# Altium PCB TSI_SAMP_SAMI_V3.4.PcbDoc (part 1 of 5)
Units mm, origin at the board's own origin, x right, y up, seen from the top; angles counter-clockwise.
Board outline 189 x 127.41 mm, 4 copper layers (Top Layer, GROUND, POWER, Bottom Layer), stack 1.56 mm thick; 227 components, 161 nets, 868 pads, 584 vias.
Unrouted connection lines stored in the file: 18.
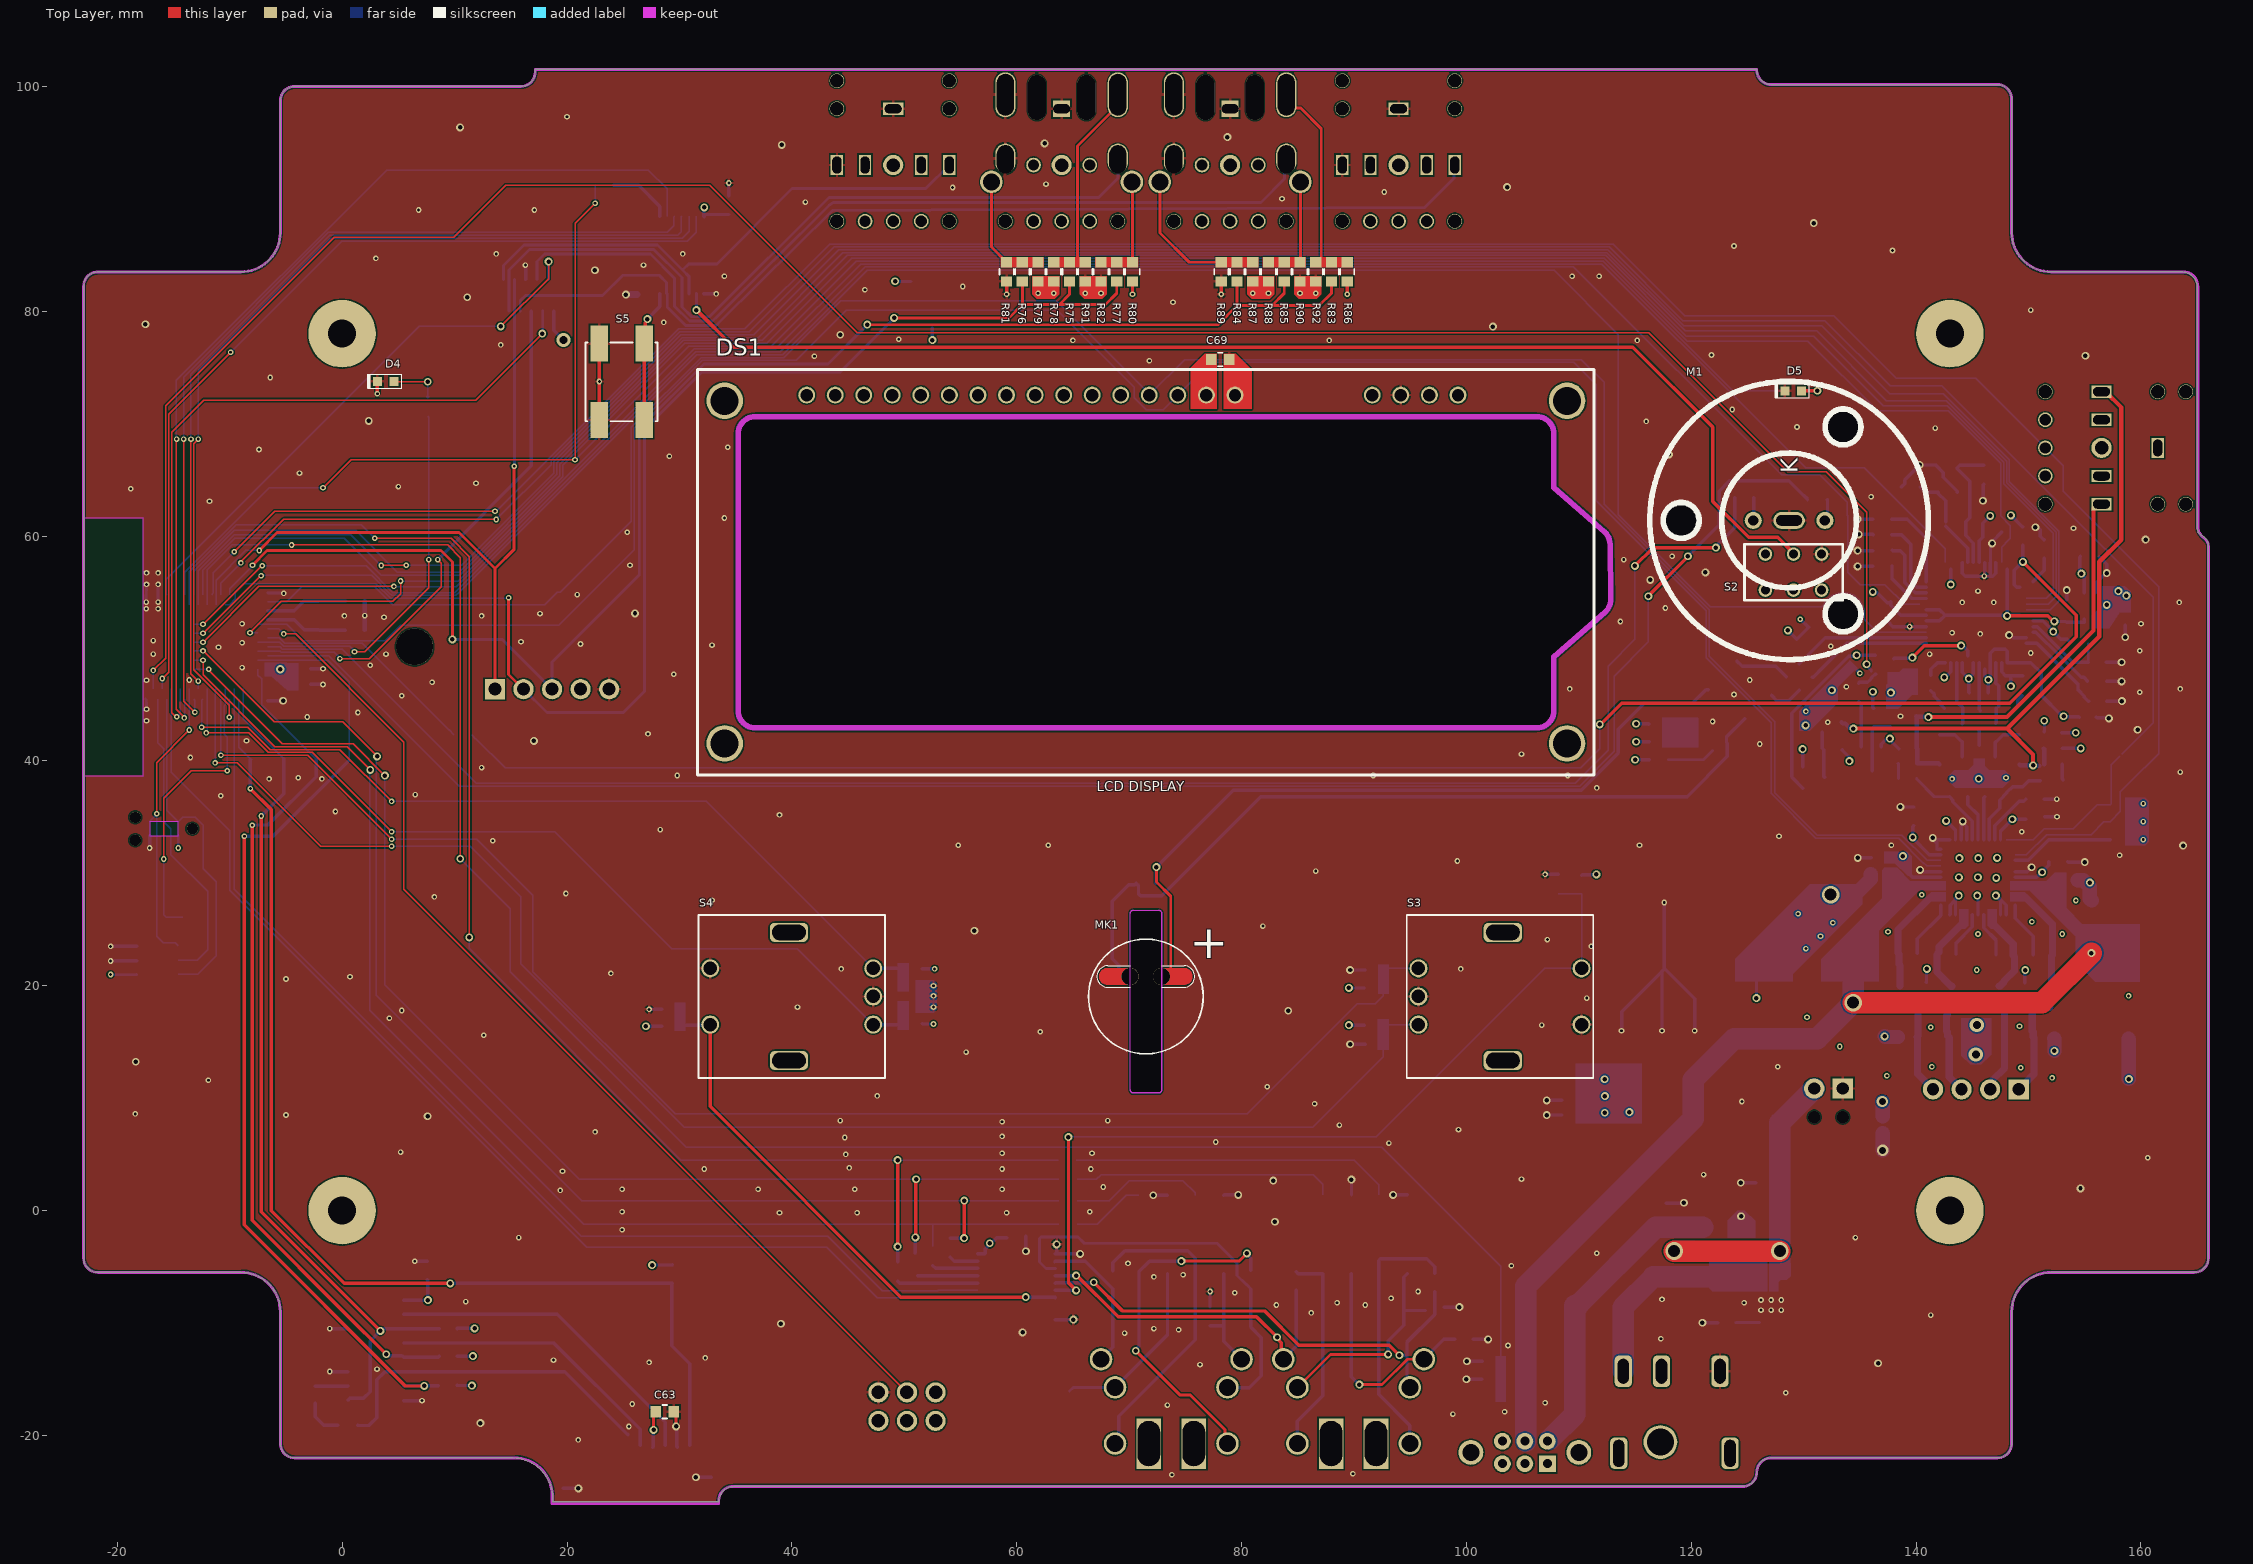
[diagram p0: Top Layer view]
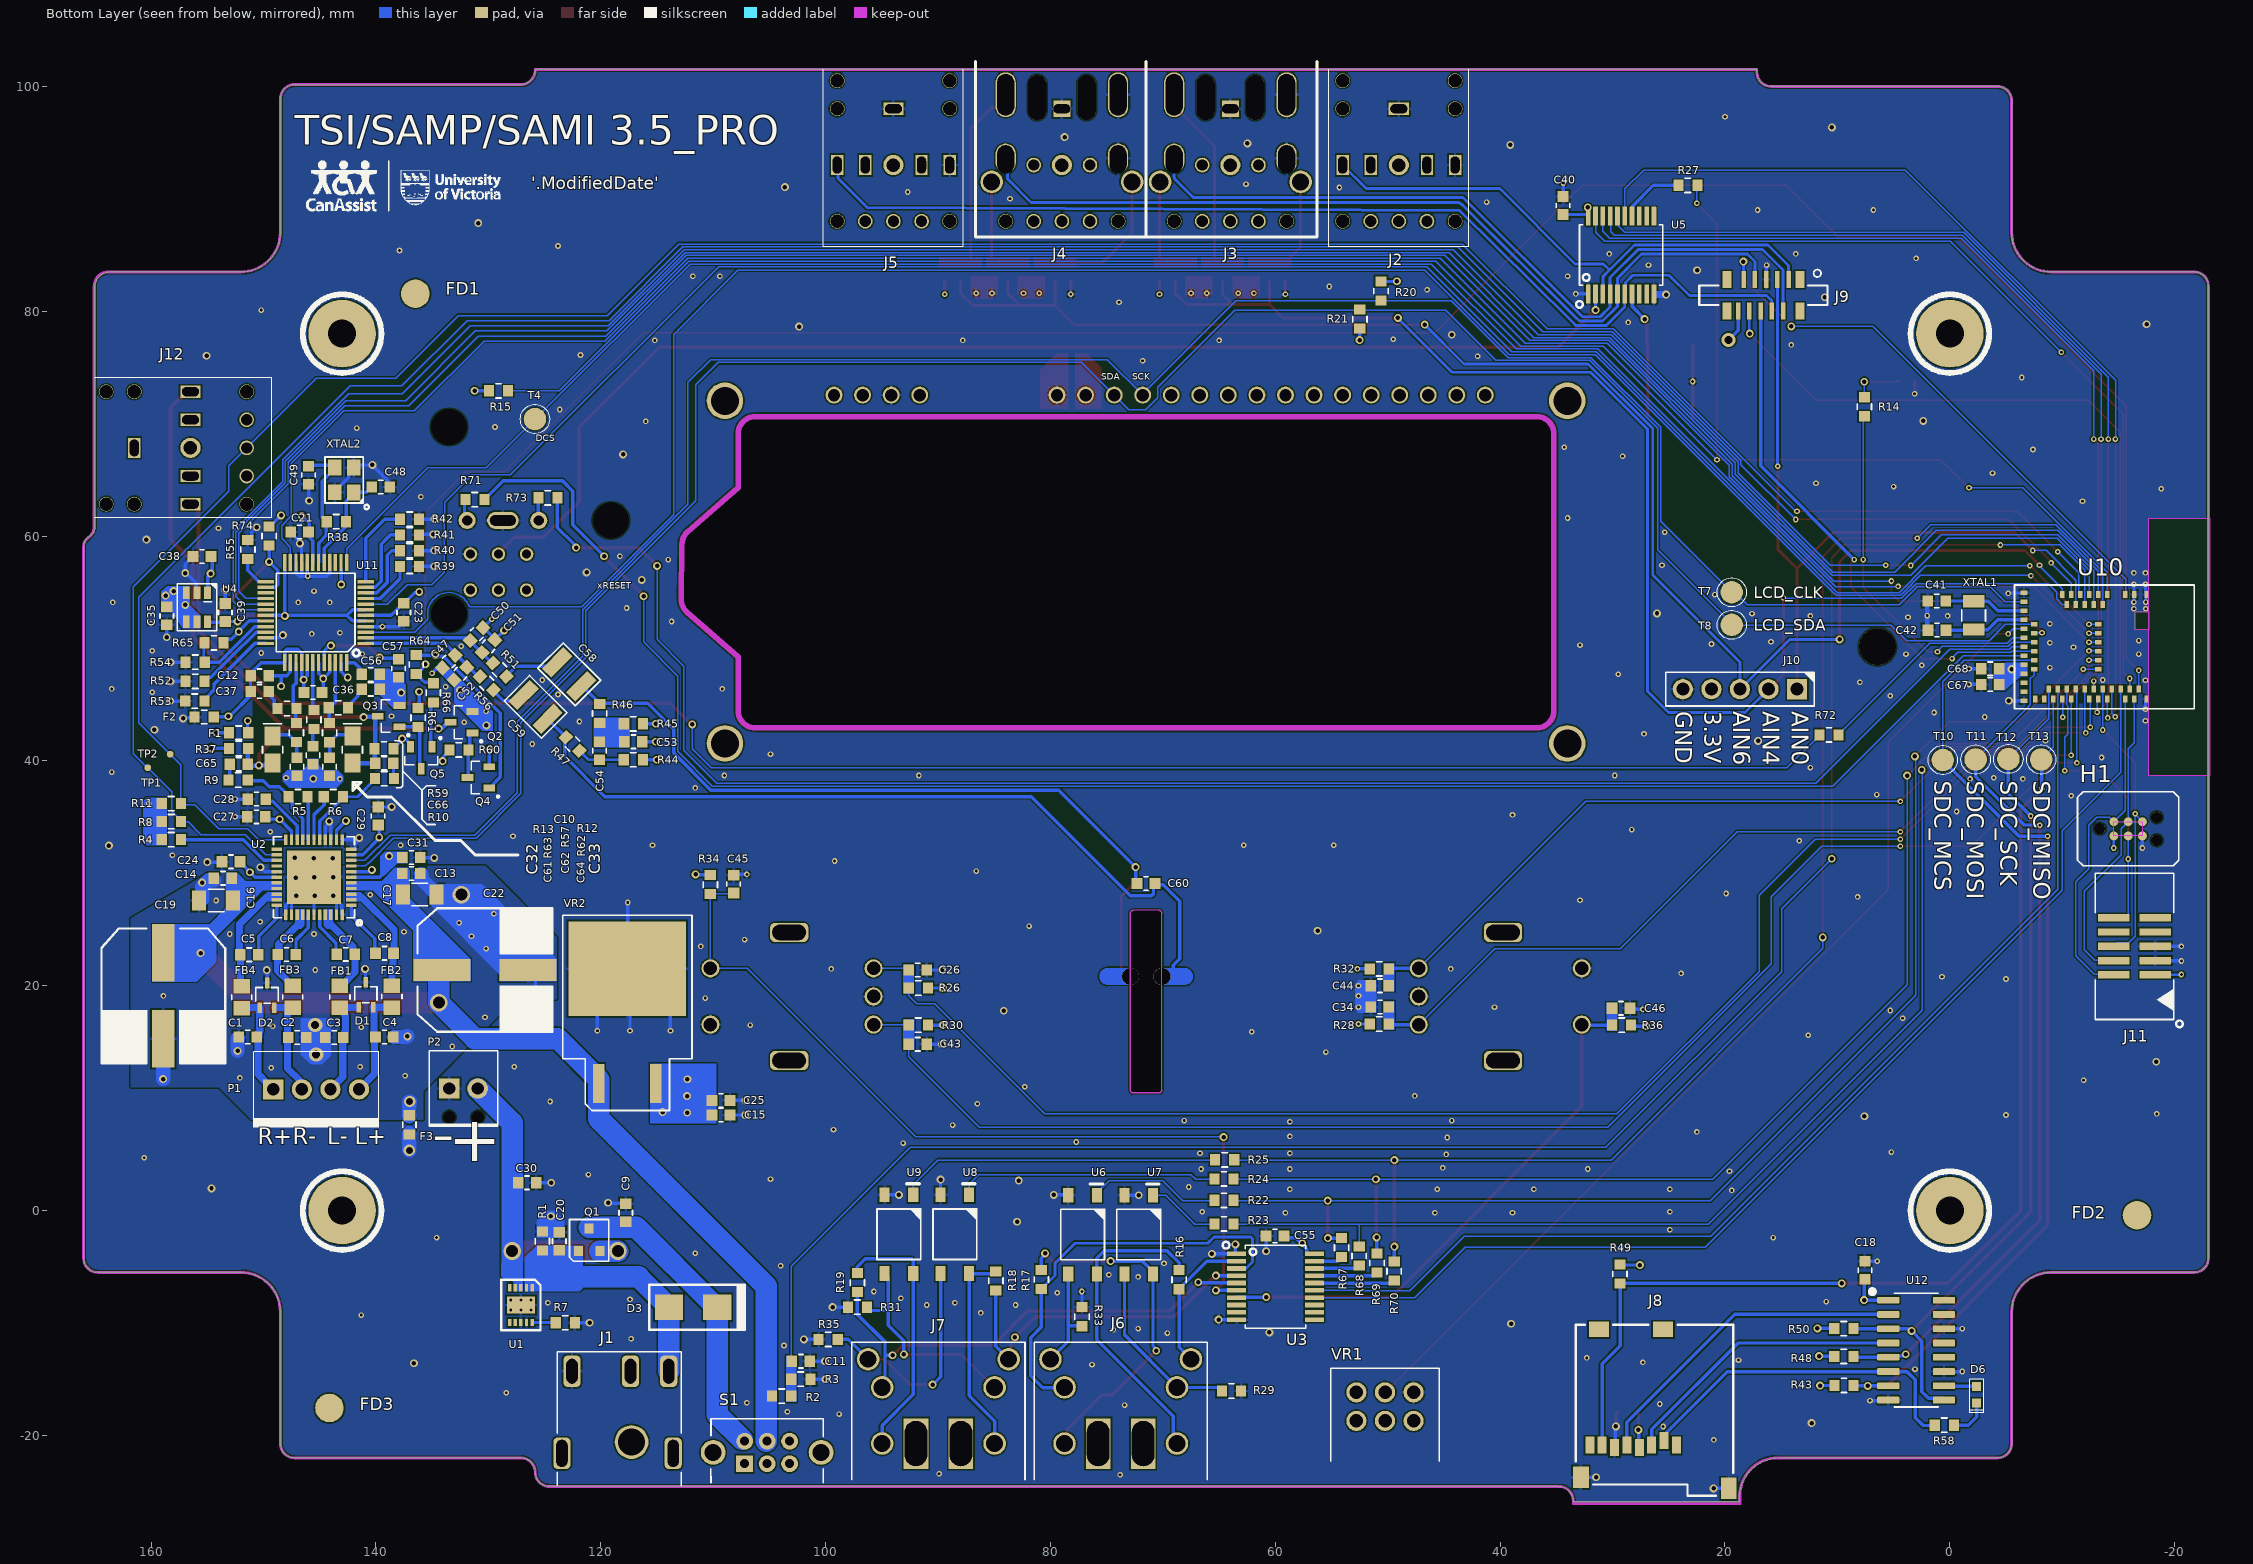
[diagram p1: Bottom Layer view, seen from below]
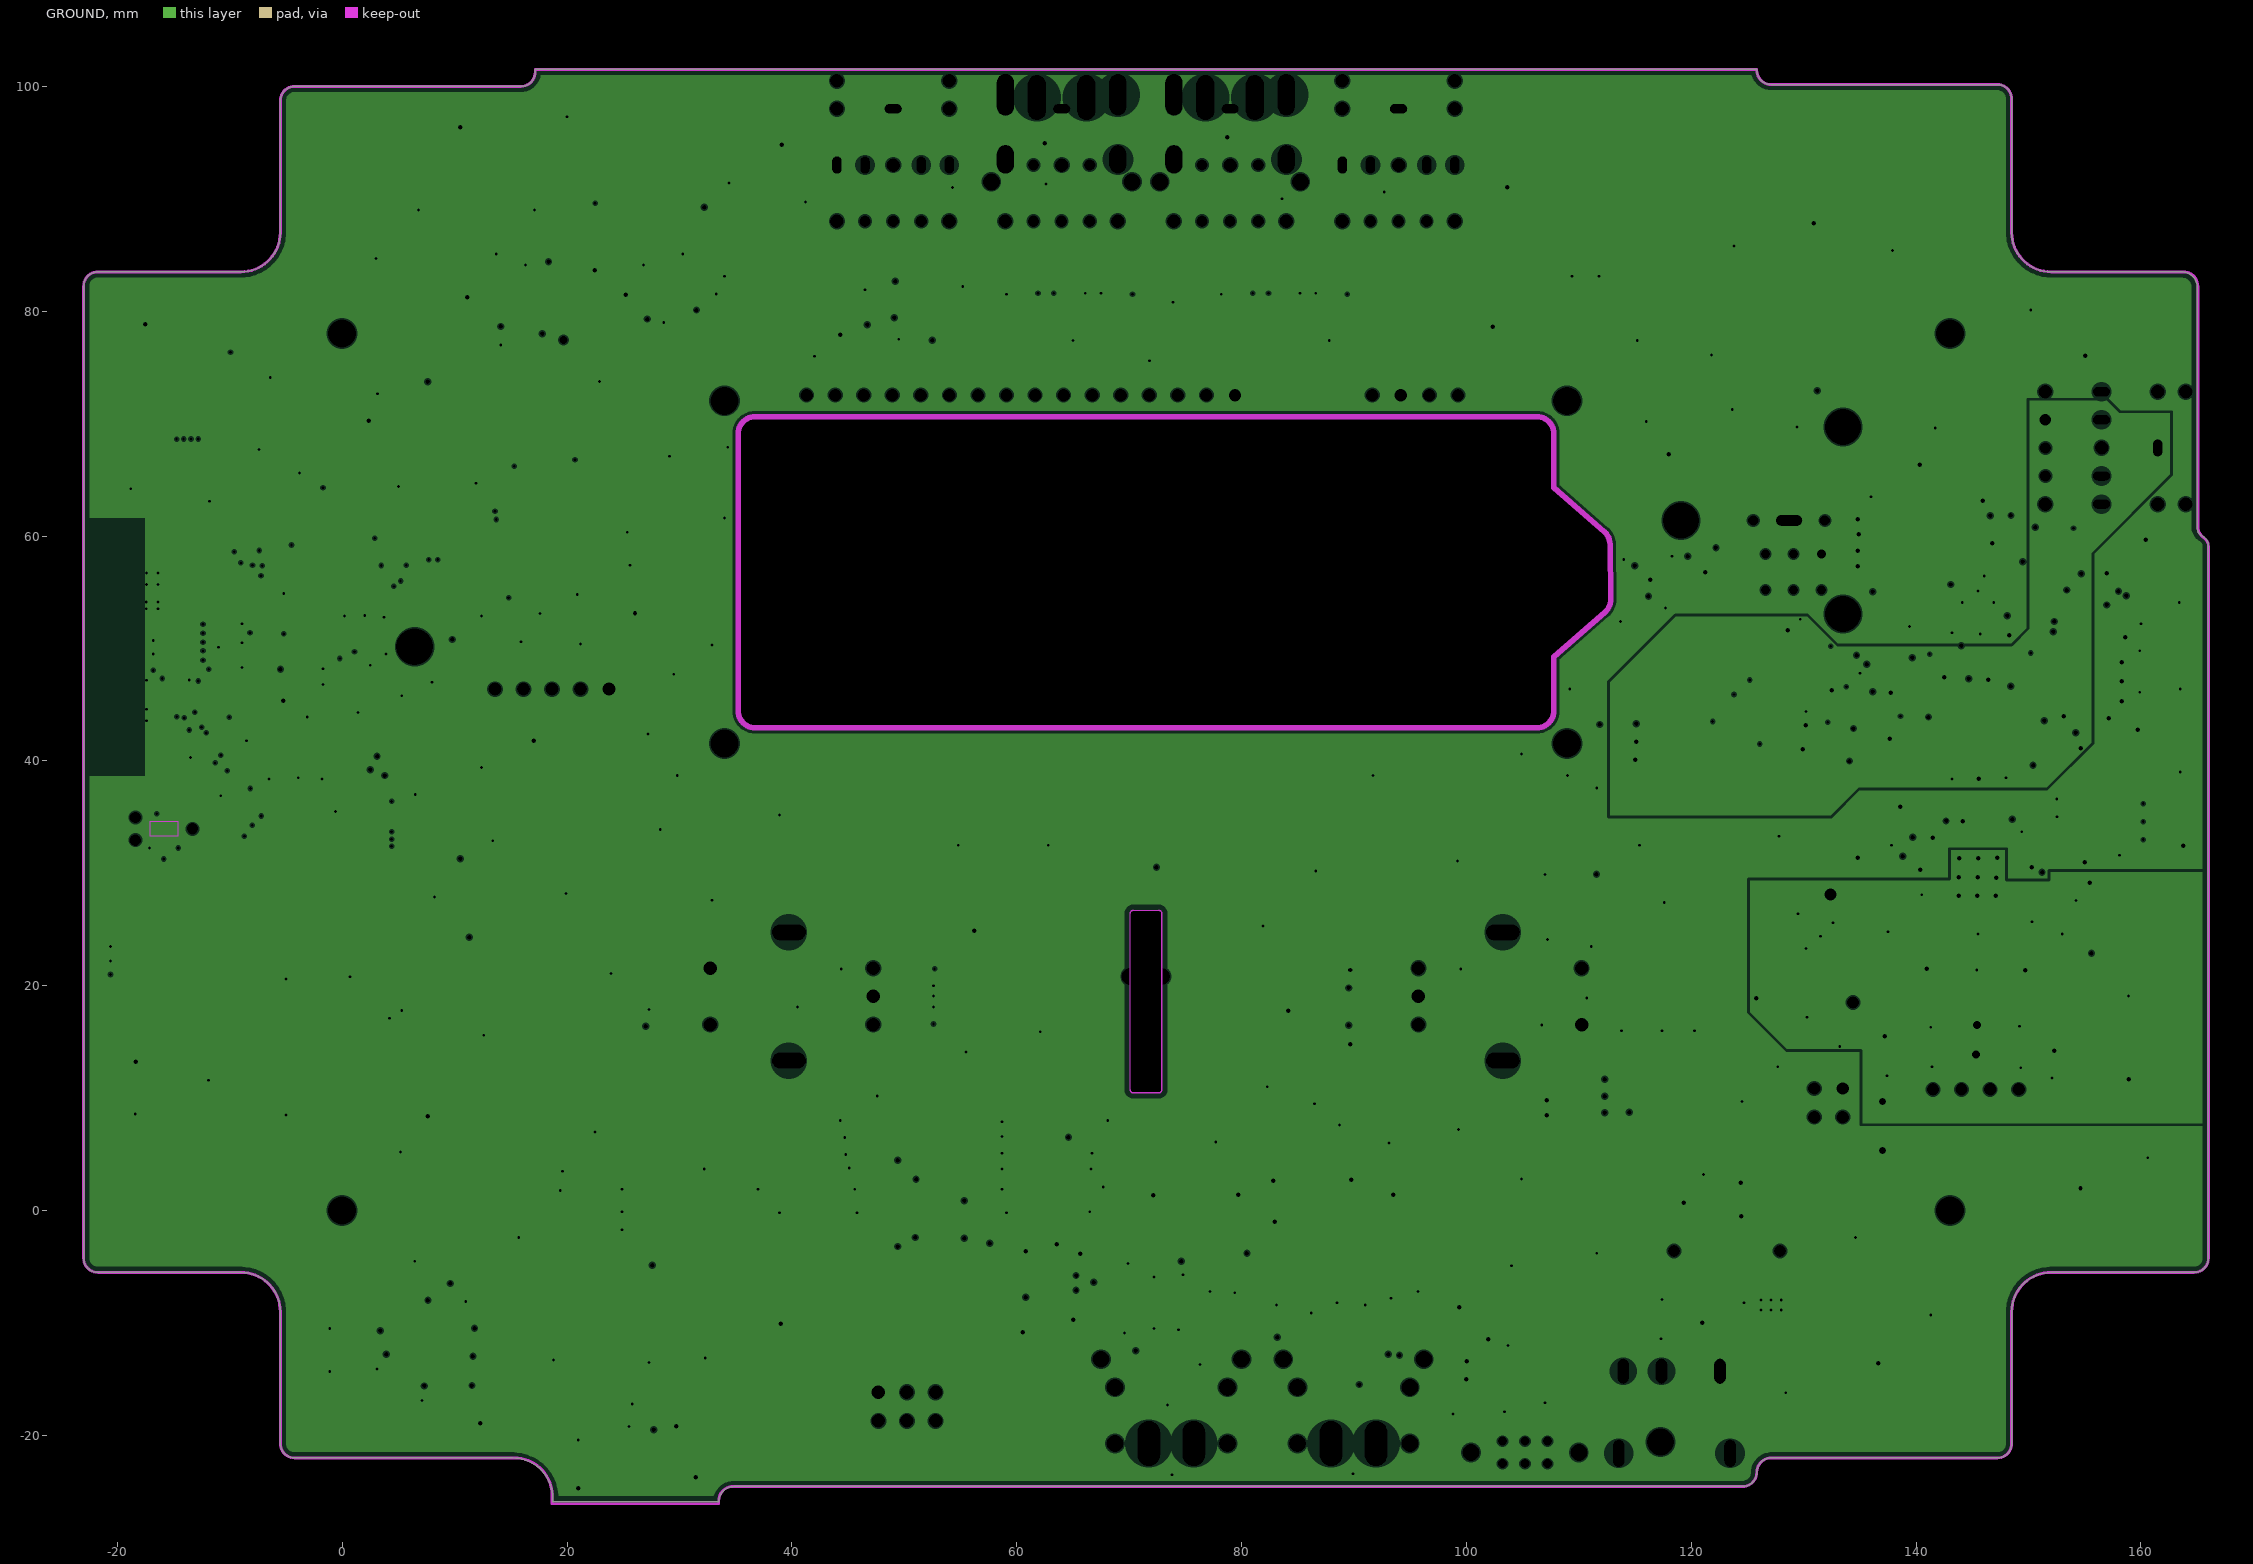
[diagram p2: GROUND, clearances drawn from the general rule]
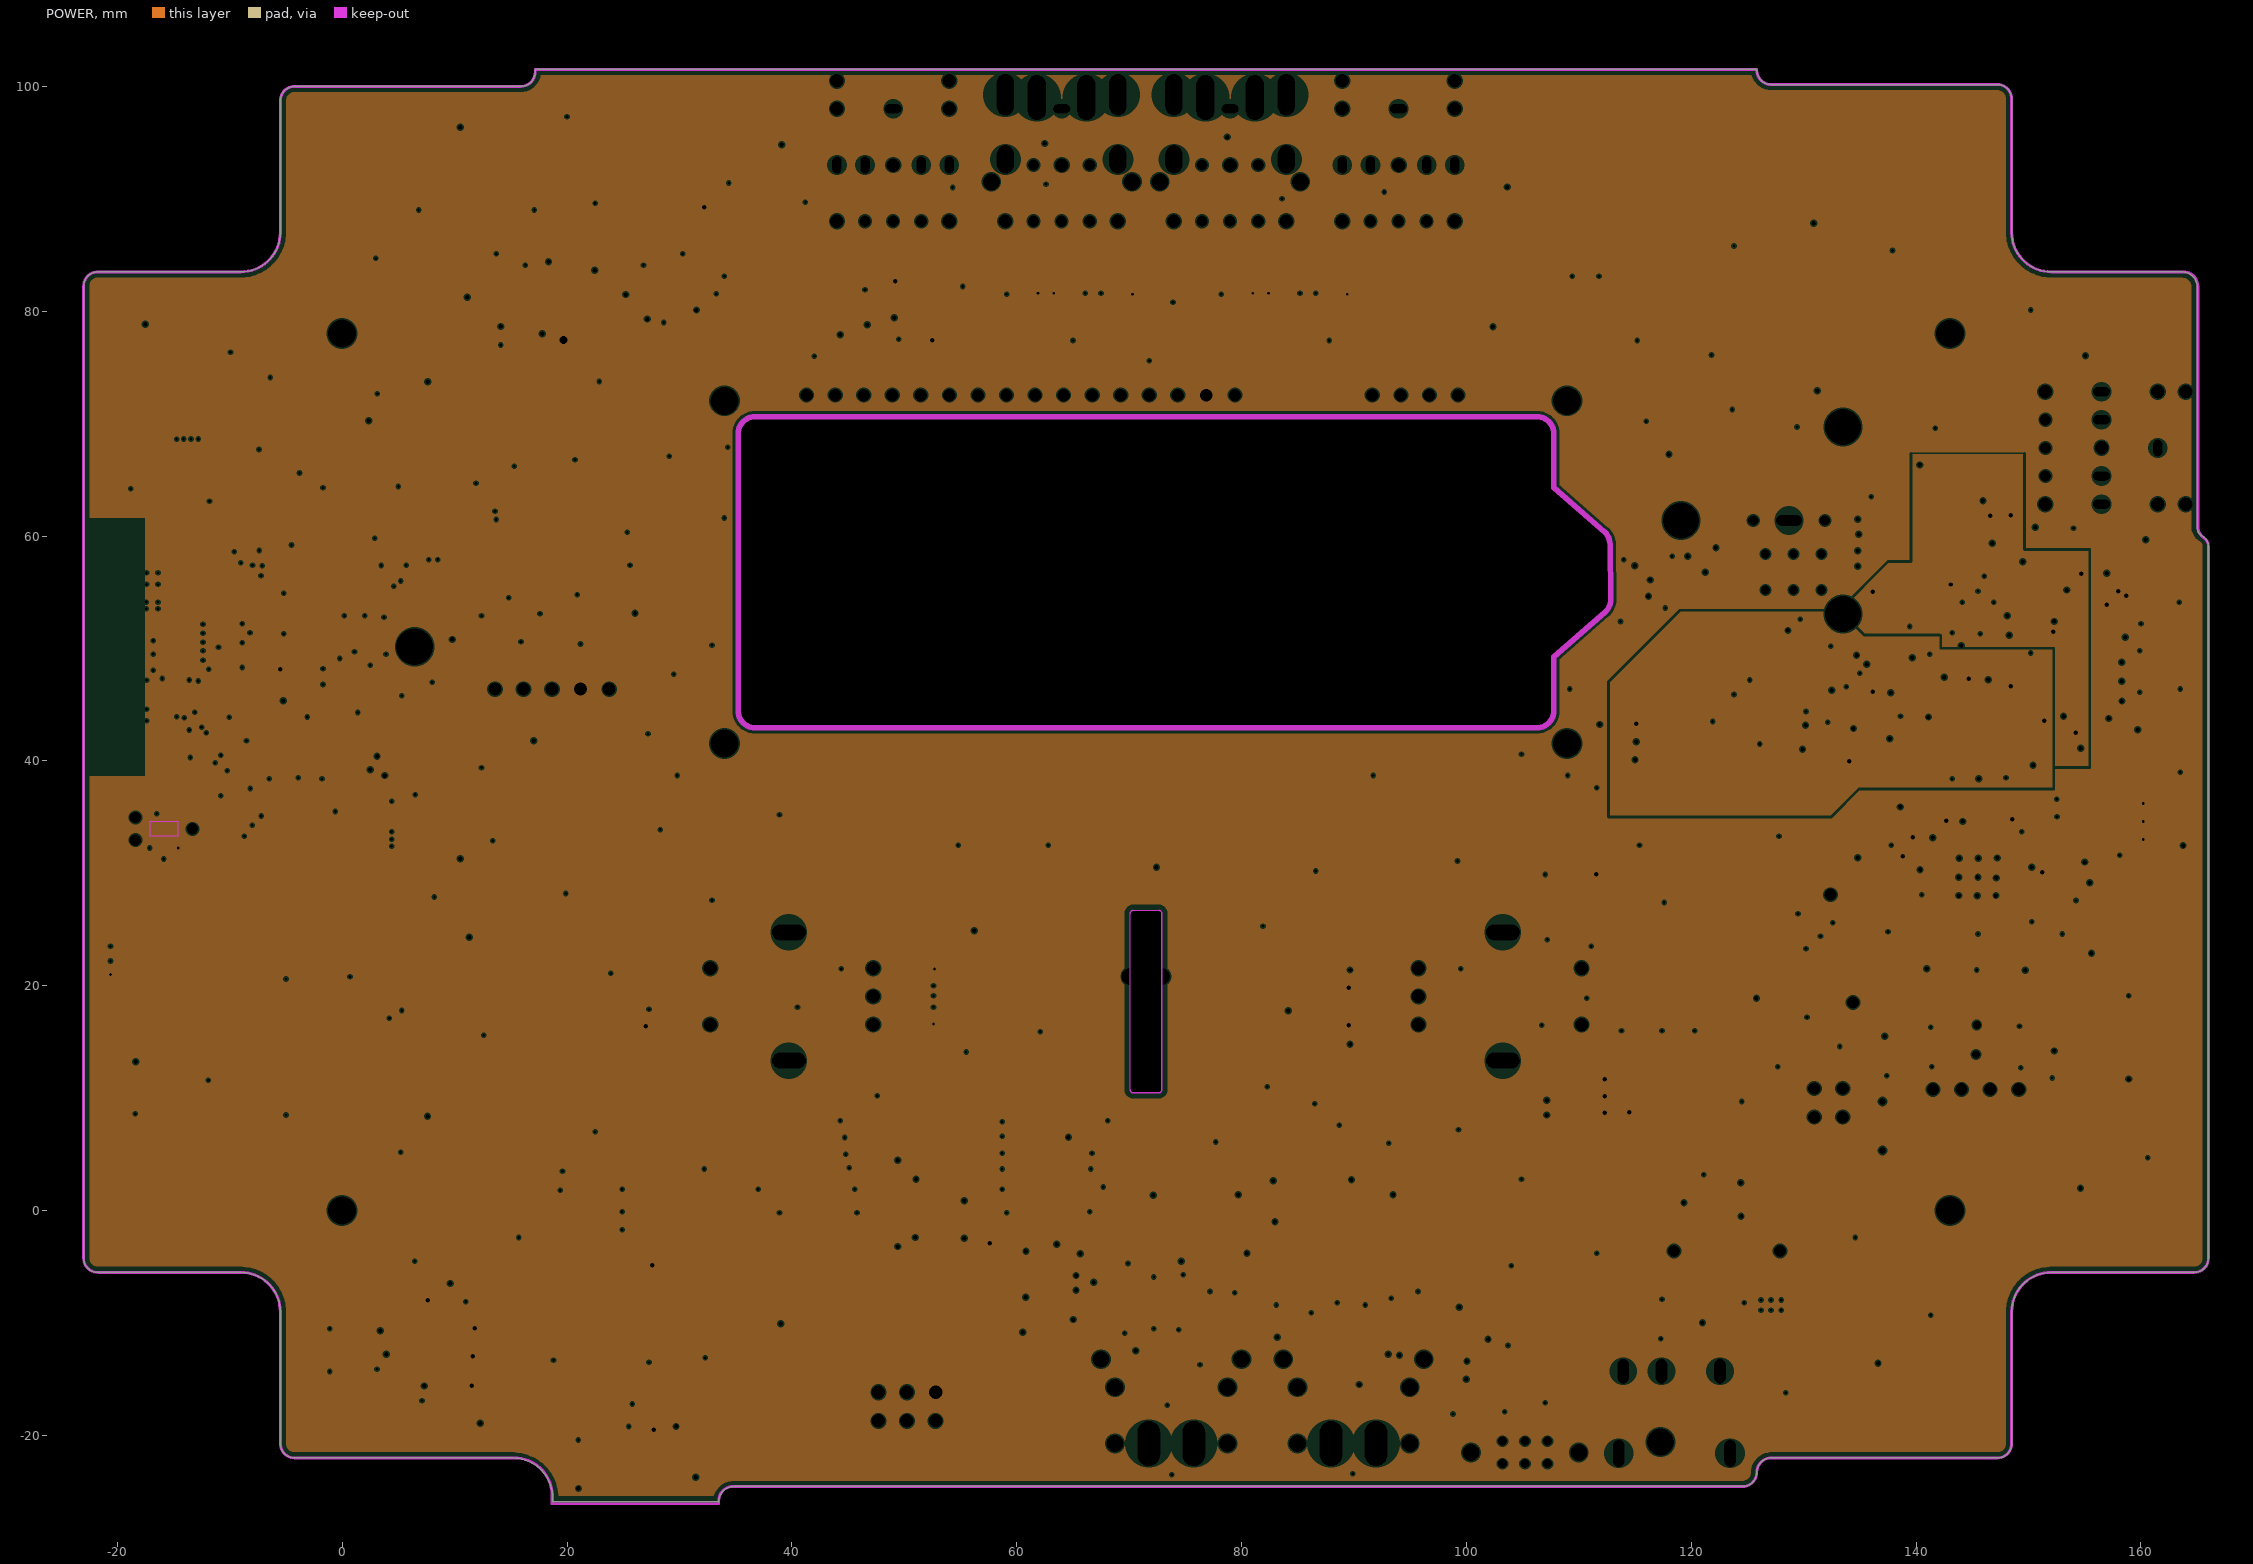
[diagram p3: POWER, clearances drawn from the general rule]

## Layer stack, top to bottom
Top Solder: solder mask 0.0102, Solder Resist, Dk 3.5
Top Layer: signal copper 0.035
Dielectric 2: prepreg 0.11, PP-006, Dk 4.29
GROUND: plane copper 0.035, net (Multiple Nets)
Dielectric 1: dielectric 1.2, FR-4, Dk 4.8
POWER: plane copper 0.035, net (Multiple Nets)
Dielectric 3: prepreg 0.11, PP-006, Dk 4.29
Bottom Layer: signal copper 0.035
Bottom Solder: solder mask 0.0102, Solder Resist, Dk 3.5

## Board outline
-21.73,-5.5 -9,-5.5 cw(c-9,-9) -5.5,-9 -5.5,-20.73 ccw(c-4.23,-20.73) -4.23,-22 15.168,-22 cw(c15.168,-25.557) 18.725,-25.557 18.725,-25.913 33.493,-25.913 cw(c34.867,-25.913) 34.867,-24.54 37.069,-24.54 124.561,-24.54 ccw(c124.561,-23.27) 125.831,-23.27 cw(c127.1,-23.269) 127.1,-22 147.23,-22 ccw(c147.23,-20.73) 148.5,-20.73 148.5,-9 cw(c152,-9) 152,-5.5 164.73,-5.5 ccw(c164.73,-4.23) 166,-4.23 166,59.115 ccw(c165.03,59.116) 165.561,59.928 165.37,60.052 cw(c165.794,60.701) 165.019,60.701 165.019,82.23 ccw(c163.616,82.096) 163.498,83.5 152,83.5 cw(c152,87) 148.5,87 148.5,98.891 ccw(c147.231,98.892) 147.23,100.161 127.101,100.161 cw(c127.101,101.431) 125.831,101.431 125.83,101.5 17.17,101.5 17.17,101.27 cw(c15.901,101.269) 15.9,100 -4.23,100 ccw(c-4.231,98.731) -5.5,98.73 -5.5,87 cw(c-9,87) -9,83.5 -21.73,83.5 ccw(c-21.731,82.231) -23,82.23 -23,-4.23 ccw(c-21.73,-4.23)
cut-out: 70.102,10.728 70.102,26.446 cw(c70.356,26.446) 70.356,26.7 72.646,26.7 cw(c72.646,26.446) 72.9,26.446 72.9,10.728 cw(c72.646,10.728) 72.646,10.474 70.356,10.474 cw(c70.356,10.728)
cut-out: 36.74,42.937 cw(c36.74,44.461) 35.216,44.461 35.216,69.099 cw(c36.74,69.099) 36.74,70.623 106.26,70.623 cw(c106.26,69.099) 107.784,69.099 107.784,64.307 112.261,60.391 cw(c111.258,59.244) 112.782,59.262 112.838,54.382 cw(c111.314,54.365) 112.317,53.218 107.784,49.253 107.784,44.461 cw(c106.26,44.461) 106.26,42.937

## Design rules (kind name [scope] priority, off if disabled: settings)
Clearance [All] p1: gap=0.127 ignorepadtopadclearanceinfootprint=TRUE except(0: Arc-Fill Track-Fill SMDPad-Fill THPad-Fill Via-Fill Fill-Fill Fill-Poly Fill-Region Fill-Text Fill-Hole)
Height [All] p1: minheight=0 maxheight=30 prefheight=12.7
HoleSize [All] p1: absolutevalues=TRUE maxlimit=6.3 minlimit=0.15 maxpercent=80.000 minpercent=20.000
HoleToHoleClearance [All] p1: gap=0.25 allowstackedmicrovias=TRUE
MinimumAnnularRing MinimumAnnularRing_1 [InComponent('J12','J2','J3','J4','J5','J6','J7','MK1')] p1: minimumring=0
MinimumAnnularRing [All] p2: minimumring=0.125
MinimumSolderMaskSliver [All] p1: minsoldermaskwidth=0.025
PlaneClearance [All] p1: clearance=0.127
PlaneConnect [All] p1: pad.planeconnectstyle=Relief pad.reliefexpansion=0.254 pad.reliefentries=4 pad.reliefconductorwidth=0.178 pad.reliefairgap=0.254 via.planeconnectstyle=Direct via.reliefexpansion=0.508 via.reliefentries=4 via.reliefconductorwidth=0.178 via.reliefairgap=0.254
PolygonConnect [All] p1: thpad.connectstyle=Relief thpad.reliefconductorwidth=0.254 thpad.reliefentries=4 thpad.polygonreliefangle="90 Angle" thpad.airgapwidth=0.152 smdpad.connectstyle=Relief smdpad.reliefconductorwidth=0.254 smdpad.reliefentries=4 smdpad.polygonreliefangle="90 Angle" smdpad.airgapwidth=0.152 via.connectstyle=Direct via.reliefconductorwidth=0.254 via.reliefentries=4 via.polygonreliefangle="90 Angle" via.airgapwidth=0.152
RoutingVias [All] p1: holewidth=0.4 width=0.7 viastyle="Through Hole" minholewidth=0.25 minwidth=0.5 maxholewidth=6 maxwidth=8
SilkToSilkClearance [All] p1 off: silktosilkclearance=0.127
SilkToSolderMaskClearance [IsPad] p1: minsilkscreentomaskgap=0.025 clearancetoexposedcopper=TRUE
SolderMaskExpansion [All] p1: expansion=0.102 istentingtop=FALSE
SupplyNets "Schematic Supply Nets_9" [InNet('PGND')] p1: voltage=0.000
SupplyNets "Schematic Supply Nets_8" [InNet('1V8')] p2: voltage=0.000
SupplyNets "Schematic Supply Nets_7" [InNet('AVDD')] p3: voltage=0.000
SupplyNets "Schematic Supply Nets_6" [InNet('9V_IN')] p4: voltage=0.000
SupplyNets "Schematic Supply Nets_5" [InNet('9V')] p5: voltage=0.000
SupplyNets "Schematic Supply Nets_4" [InNet('VBAT')] p6: voltage=0.000
SupplyNets "Schematic Supply Nets_3" [InNet('3V3_LDO')] p7: voltage=0.000
SupplyNets "Schematic Supply Nets_2" [InNet('GND')] p8: voltage=0.000
SupplyNets "Schematic Supply Nets_1" [InNet('3V3')] p9: voltage=0.000
SupplyNets "Schematic Supply Nets" [InNet('AGND')] p10: voltage=0.000
UnRoutedNet [All] p1: checkbadconnections=TRUE
Width [All] p1: maxlimit=1.905 minlimit=0.102 preferedwidth=0.254
21 further rules are at their usual default settings.

## Components (designator, comment, footprint, x,y, rotation, side; value= is the part's Value field where it differs from the comment)
C1 "470pF" Cap_0603_M 151.396,15.44 r180 bottom
C2 "470pF" Cap_0603_M 147,15.4 r180 bottom
C3 "470pF" Cap_0603_M 143.7,15.4 r180 bottom
C4 "470pF" Cap_0603_M 139.243,15.44 r180 bottom
C5 "0.1uF" Cap_0603_M 151.269,22.755 r0 bottom
C6 "0.1uF" Cap_0603_M 147.942,22.768 r0 bottom
C7 "0.1uF" Cap_0603_M 142.684,22.793 r0 bottom
C8 "0.1uF" Cap_0603_M 139.23,22.895 r0 bottom
C9 "10uF" Cap_0603_M 117.779,-0.2 r270 bottom
C10 "0.1uF" Cap_0603_M 145.593,46.072 r180 bottom
C11 "1nF" Cap_0603_M 102.2,-13.4 r0 bottom
C12 "10uF" Cap_0603_M 150.342,47.571 r180 bottom
C13 "1uF" Cap_0603_M 136.843,29.981 r0 bottom
C14 "1uF" Cap_0603_M 153.608,29.554 r180 bottom
C15 "10uF" Cap_0603_M 109.3,8.5 r0 bottom
C16 "10uF" CAP-1206 154.216,27.581 r180 bottom
C17 "10uF" CAP-1206 136.106,28.127 r0 bottom
C18 "0.1uF" Cap_0603_M 7.556,-5.299 r270 bottom
C19 "330uF" "CAP ALUM 330UF 20% 50V SMD" 158.9,19.1 r270 bottom
C20 "1uF" Cap_0603_M 123.685,-2.73 r270 bottom
C21 "10uF" Cap_0603_M 146.786,60.36 r180 bottom
C22 "330uF" "CAP ALUM 330UF 20% 50V SMD" 130.3,21.4 r180 bottom
C23 "0.1uF" Cap_0603_M 137.515,53.209 r90 bottom
C24 "1uF" Cap_0603_M 152.895,31.035 r180 bottom
C25 "10uF" Cap_0603_M 109.3,9.8 r0 bottom
C26 "0.1uF" Cap_0603_M 91.8,21.4 r0 bottom
C27 "1uF" Cap_0603_M 150.633,35.023 r180 bottom
C28 "2.2uF" Cap_0603_M 150.609,36.598 r180 bottom
C29 "1uF" Cap_0603_M 139.8,35.1 r270 bottom
C30 "1uF" Cap_0603_M 126.55,2.475 r0 bottom
C31 "1uF" Cap_0603_M 136.842,31.404 r0 bottom
C32 "T491A106K010AT" CAPMP3.4X1.6_1.8N_KEM-M 149.19,41.007 r270 bottom
C33 "T491A106K010AT" CAPMP3.4X1.6_1.8N_KEM-M 142.087,41 r270 bottom
C34 "0.1uF" Cap_0603_M 50.7,18.1 r180 bottom
C35 "10uF" Cap_0603_M 158.6,52.9 r90 bottom
C36 "0.01uF" Cap_0603_M 140.449,46.377 r0 bottom
C37 "0.01uF" Cap_0603_M 150.342,46.174 r180 bottom
C38 "10uF" Cap_0603_M 155.473,58.188 r180 bottom
C39 "10uF" Cap_0603_M 153.4,53.2 r270 bottom
C40 "0.1uF" Cap_0603_M 34.4,89.4 r270 bottom
C41 "CAP 22pF" Cap_0603_M 1.158,54.222 r180 bottom
C42 "CAP 22pF" Cap_0603_M 1.145,51.631 r180 bottom
C43 "0.1uF" Cap_0603_M 91.8,14.8 r0 bottom
C44 "0.1uF" Cap_0603_M 50.7,20 r180 bottom
C45 "0.1uF" Cap_0603_M 108.178,29.041 r270 bottom
C46 "0.1uF" Cap_0603_M 29.25,18 r0 bottom
C47 "0.1uF" Cap_0603_M 133.515,48.841 r135 bottom
C48 "15pF" Cap_0603_M 139.56,64.359 r0 bottom
C49 "15pF" Cap_0603_M 145.999,65.418 r270 bottom
C50 "0.1uF" Cap_0603_M 131.038,51.279 r315 bottom
C51 "10nF" Cap_0603_M 129.984,50.2 r315 bottom
C52 "10nF" Cap_0603_M 132.478,47.758 r135 bottom
C53 "10uF" Cap_0603_M 117.1,41.7 r0 bottom
C54 "10uF" Cap_0603_M 120.1,40.9 r90 bottom
C55 "0.1uF" Cap_0603_M 60.02,-2.264 r180 bottom
C56 "0.1uF" Cap_0603_M 140.449,47.698 r180 bottom
C57 "1uF" Cap_0603_M 137.998,48.231 r270 bottom
C58 "1uF 1210" CAP_1210_N 122.8,47.7 r45 bottom
C59 "1uF 1210" CAP_1210_N 125.8,44.8 r45 bottom
C60 "100pF" Cap_0603_M 71.5,29.1 r0 bottom
C61 "3.3nF" Cap_0603_M 147.028,39.481 r90 bottom
C62 "0.047uF" Cap_0603_M 145.605,40.509 r90 bottom
C63 "10uF" Cap_0603_M 28.7,-17.9 r180 top
C64 "3.3nF" Cap_0603_M 144.119,39.481 r90 bottom
C65 "0.47uF" Cap_0603_M 152.2,39.7 r0 bottom
C66 "0.47uF" Cap_0603_M 139.253,39.783 r180 bottom
C67 "10uF" Cap_0603_M -3.6,46.8 r180 bottom
C68 "10uF" Cap_0603_M -3.6,48.2 r180 bottom
C69 "10uF" Cap_0603_M 78.1,75.7 r180 top
D1 "TPD2E007DCKR" SOT-SC70 140.894,19.199 r180 bottom
D2 "TPD2E007DCKR" SOT-SC70 149.682,19.151 r180 bottom
D3 "20V 3A SCHOTTKY" SCHOTTKY_20V_3A_SMB 111.785,-8.601 r180 bottom
D4 "GREEN_0603" LED_0603_SMD 3.906,73.76 r180 top locked
D5 "RED_0603" LED_0603_SMD 129.095,72.92 r180 top
D6 "RED_0603" LED_0603_SMD -2.388,-16.361 r270 bottom
DS1 "LCD_Screen_16x2" LCD_Screen_16x2 34.023,41.551 r0 top locked
F1 "FERRITE BEAD" FER_8A_4mOHM_0603 152.2,42.5 r180 bottom
F2 "FERRITE BEAD" FER_8A_4mOHM_0603 155.268,43.896 r180 bottom
F3 "FERRITE BEAD" FER_8A_4mOHM_0603 137.024,7.629 r270 bottom
FB1 "220R 3A" FB_0805 143.205,19.008 r90 bottom
FB2 "220R 3A" FB_0805 138.582,19.034 r90 bottom
FB3 "220R 3A" FB_0805 147.396,19.011 r90 bottom
FB4 "220R 3A" FB_0805 151.93,18.973 r90 bottom
H1 "TAG_CONNECT_TC2030" TAG_CONNECT_TC2030 -15.86,33.959 r180 bottom
J1 "DC_IN" CONN_DC_JACK_2.1mmID_5.5mmOD_RA_TH 117.255,-20.591 r90 bottom locked
J2 "3.5MM TRS" CONN_JACK_STEREO_3.5MM_SPDT_RA 49.009,94.252 r270 bottom locked
J3 "3.5mm DBL" CONN_3.5MM_COMBO 63.995,98.002 r270 bottom locked
J4 "3.5mm DBL" CONN_3.5MM_COMBO 78.981,98.002 r270 bottom locked
J5 "3.5MM TRS" CONN_JACK_STEREO_3.5MM_SPDT_RA 93.967,94.252 r270 bottom locked
J6 "3.5mm DBL" CONN_3.5MM_STEREO_DBL_VERT_TH 73.749,-24.222 r90 bottom locked
J7 "3.5mm DBL" CONN_3.5MM_STEREO_DBL_VERT_TH 89.967,-24.222 r90 bottom locked
J8 "CONN_SD_CARD_SMD" CONN_SD_CARD_SMD 26.265,-17.763 r0 bottom locked
J9 "687310124422" 687310124422 16.586,81.42 r0 bottom
J10 "CONN_2.54mm" HDRV5W67P0X254_1X5_1270X241X858P 13.589,46.377 r0 bottom
J11 "CONN_1.27mm" CONN_10x_3220-10-0300-00 -16.425,23.504 r90 bottom
J12 "3.5MM TRS" CONN_JACK_STEREO_3.5MM_SPDT_RA 157.743,67.84 r180 bottom locked
M1 "LED Dome" LED_Dome_4LED 128.702,61.388 r90 top locked
MK1 "MIC OMNI" "MIC_ELECTRET_CASTLE PAD" 71.488,19.046 r0 top
P1 "1725672" 1725672 145.313,10.779 r180 bottom
P2 "1725656" 1725656 132.207,10.855 r180 bottom
Q1 "20V_3.6A" MOSFET_P-CH_20V_SOT23 121.029,-2.6 r180 bottom
Q2 "BC848CLT1G" onSemi_SOT-23_N 132.385,43.434 r0 bottom
Q3 "BC848CLT1G" onSemi_SOT-23_N 138.862,43.977 r0 bottom
Q4 "BC848CLT1G" onSemi_SOT-23_N 130.886,38.532 r0 bottom
Q5 "BC848CLT1G" onSemi_SOT-23_N 135.966,40.284 r270 bottom
R1 "100K" Res_0603_M 125.185,-2.716 r90 bottom
R2 "3.6M" Res_0603_M 103.9,-16.5 r180 bottom
R3 "2M" Res_0603_M 102.2,-15 r180 bottom
R4 "100K" Res_0603_M 158.2,33 r0 bottom
R5 "20K" Res_0603_M 146.926,36.814 r180 bottom
R6 "20K" Res_0603_M 143.789,36.814 r0 bottom
R7 "2.1K 1%" Res_0603_M 123.15,-9.975 r180 bottom
R8 "10k" Res_0603_M 158.2,34.6 r180 bottom
R9 "20K" Res_0603_M 152.25,38.3 r180 bottom
R10 "20K" Res_0603_M 139.243,38.427 r0 bottom
R11 "10k" Res_0603_M 158.2,36.2 r180 bottom
R12 "22R" Res_0603_M 143.345,44.726 r180 bottom
R13 "22R" Res_0603_M 147.904,44.662 r0 bottom
R14 "1K" Res_0603_M 7.6,71.5 r270 bottom
R15 "1K" Res_0603_M 129.095,72.92 r180 bottom
R16 "0R" Res_0603_M 68.554,-6.15 r90 bottom
R17 "0R" Res_0603_M 80.81,-6.125 r90 bottom
R18 "0R" Res_0603_M 84.861,-6.252 r90 bottom
R19 "0R" Res_0603_M 97.167,-6.404 r90 bottom
R20 "4K7" Res_0603_M 50.6,81.8 r270 bottom
R21 "4K7" Res_0603_M 52.48,79.3 r90 bottom
R22 "190R" Res_0603_M 64.567,0.915 r180 bottom
R23 "190R" Res_0603_M 64.567,-1.185 r180 bottom
R24 "190R" Res_0603_M 64.567,2.815 r180 bottom
R25 "190R" Res_0603_M 64.503,4.518 r180 bottom
R26 "10k" Res_0603_M 91.75,19.8 r0 bottom
R27 "0R" Res_0603_M 23.3,91.2 r180 bottom
R28 "10k" Res_0603_M 50.75,16.6 r180 bottom
R29 "0R" Res_0603_M 63.893,-16.044 r0 bottom
R30 "10k" Res_0603_M 91.75,16.5 r0 bottom
R31 "0R" Res_0603_M 97.167,-8.587 r180 bottom
R32 "10k" Res_0603_M 50.75,21.5 r180 bottom
R33 "0R" Res_0603_M 77.194,-9.437 r270 bottom
R34 "10k" Res_0603_M 110.25,29 r270 bottom
R35 "0R" Res_0603_M 99.771,-11.459 r180 bottom
R36 "10k" Res_0603_M 29.2,16.5 r0 bottom
R37 "10k" Res_0603_M 152.2,41.1 r0 bottom
R38 "1M" Res_0603_M 143.523,61.277 r180 bottom
R39 "100K" Res_0603_M 137,57.3 r180 bottom
R40 "100K" Res_0603_M 137,58.7 r180 bottom
R41 "100K" Res_0603_M 137,60.1 r180 bottom
R42 "100K" Res_0603_M 137,61.5 r180 bottom
R43 "10k" Res_0603_M 9.41,-15.548 r180 bottom
R44 "1K" Res_0603_M 117.1,40.1 r180 bottom
R45 "1K" Res_0603_M 117.1,43.3 r0 bottom
R46 "1K" Res_0603_M 120.091,44.22 r270 bottom
R47 "1K" Res_0603_M 122.5,41.5 r225 bottom
R48 "10k" Res_0603_M 9.436,-12.97 r180 bottom
R49 "10k" Res_0603_M 29.349,-5.642 r270 bottom
R50 "10k" Res_0603_M 9.436,-10.494 r180 bottom
R51 "100R" Res_0603_M 128.997,48.1 r225 bottom
R52 "100K" Res_0603_M 156.083,47.075 r180 bottom
R53 "100K" Res_0603_M 156.108,45.323 r180 bottom
R54 "100K" Res_0603_M 156.075,48.777 r180 bottom
R55 "100K" Res_0603_M 151.393,58.804 r270 bottom
R56 "100R" Res_0603_M 130.138,46.906 r225 bottom
R57 "10R" Res_0603_M 145.516,43.672 r270 bottom
R58 "1K" Res_0603_M 0.497,-19.092 r0 bottom
R59 "10k" Res_0603_M 139.281,41.081 r180 bottom
R60 "10k" Res_0603_M 132.613,40.979 r0 bottom
R61 "10k" Res_0603_M 136.245,43.85 r90 bottom
R62 "470R" Res_0603_M 144.119,42.503 r90 bottom
R63 "470R" Res_0603_M 147.066,42.516 r90 bottom
R64 "10k" Res_0603_M 136.41,48.574 r270 bottom
R65 "0R" Res_0603_M 154.4,50.5 r180 bottom
R66 "10k" Res_0603_M 134.886,46.059 r90 bottom
R67 "0R" Res_0603_M 54.102,-3.289 r90 bottom
R68 "0R" Res_0603_M 52.54,-4.039 r90 bottom
R69 "0R" Res_0603_M 50.952,-4.661 r90 bottom
R70 "0R" Res_0603_M 49.428,-5.385 r90 bottom
R71 "1K" Res_0603_M 131.191,63.246 r0 bottom
R72 "0R" Res_0603_M 10.744,42.313 r180 bottom
R73 "1K" Res_0603_M 124.7,63.4 r0 bottom
R74 "0R" Res_0603_M 149.501,60.008 r90 bottom
R75 "0R" Res_0603_M 64.7,83.5 r270 top
R76 "0R" Res_0603_M 60.5,83.5 r270 top
R77 "0R" Res_0603_M 68.9,83.5 r270 top
R78 "0R" Res_0603_M 63.3,83.5 r270 top
R79 "0R" Res_0603_M 61.9,83.5 r270 top
R80 "0R" Res_0603_M 70.3,83.5 r270 top
R81 "0R" Res_0603_M 59.1,83.5 r270 top
R82 "0R" Res_0603_M 67.5,83.5 r270 top
R83 "0R" Res_0603_M 88,83.5 r270 top
R84 "0R" Res_0603_M 79.6,83.5 r270 top
R85 "0R" Res_0603_M 83.8,83.5 r270 top
R86 "0R" Res_0603_M 89.4,83.5 r270 top
R87 "0R" Res_0603_M 81,83.5 r270 top
R88 "0R" Res_0603_M 82.4,83.5 r270 top
R89 "0R" Res_0603_M 78.2,83.5 r270 top
R90 "0R" Res_0603_M 85.2,83.5 r270 top
R91 "0R" Res_0603_M 66.1,83.5 r270 top
R92 "0R" Res_0603_M 86.6,83.5 r270 top
S1 "SWITCH SLIDE DPDT 200MA 30V" SW_SLIDE_RA_TH_DPDT 105.2,-21.514 r270 bottom locked
S2 "VERT_SLIDE_SW" SW_SLIDE_SPDT_VERT_TH 129.095,56.791 r0 top locked
S3 "ENCODER" ENC_ROTARY_20PPR_TH 103.238,19.046 r270 top locked
S4 "ENCODER" ENC_ROTARY_20PPR_TH 39.738,19.046 r90 top locked
S5 "SW_TACTILE-NO" SW_TACTILE_SPST-NO 24.852,73.716 r90 top
T4 "CONN_TP_SMD" CONN_TP_SMD 125.851,70.405 r180 bottom
T7 "CONN_TP_SMD" CONN_TP_SMD 19.4,55 r180 bottom
T8 "CONN_TP_SMD" CONN_TP_SMD 19.4,52.1 r180 bottom
T10 "CONN_TP_SMD" CONN_TP_SMD 0.625,40.075 r0 bottom
T11 "CONN_TP_SMD" CONN_TP_SMD -2.292,40.125 r0 bottom
T12 "CONN_TP_SMD" CONN_TP_SMD -5.208,40.176 r0 bottom
T13 "CONN_TP_SMD" CONN_TP_SMD -8.125,40.125 r0 bottom
TP1 "Test Point" "TEST POINT ROUND SMD 0.6mm" 160.3,39.4 r90 bottom
TP2 "Test Point" "TEST POINT ROUND SMD 0.6mm" 158.3,40.6 r90 bottom
U1 "8.4V Charge current 1.1A" LIPO-CHARGING_8.4V_10DFN 127.1,-8.4 r0 bottom
U2 "MAX9744" MAX9744_T4477 145.504,29.651 r0 bottom
U3 "MAX6818EAP+T" IC_DEBOUNCE_8IN8OUT_SMD 59.982,-6.773 r180 bottom
U4 "REG 1.8V/3.3V" IC_REG_LINEAR_3V3_1V8_SMD 155.918,53.662 r0 bottom
U5 "MAX6818EAP+T" IC_DEBOUNCE_8IN8OUT_SMD 29.241,85 r90 bottom
U6 "SSR" IC_SSR_NO_SMD 77.144,-2.135 r0 bottom
U7 "SSR" IC_SSR_NO_SMD 72.144,-2.135 r0 bottom
U8 "SSR" IC_SSR_NO_SMD 88.506,-2.101 r0 bottom
U9 "SSR" IC_SSR_NO_SMD 93.476,-2.101 r0 bottom
U10 "IC_MDBT50Q-1M_SMD" IC_MDBT50Q-1M_SMD -6,55.4 r270 bottom locked
U11 "IC_VS1053B_LQFP48" IC_VS1053B_LQFP48 145.351,53.197 r0 bottom
U12 "IC BUF ESD" IC_BUF_ESD_CD74HC4050MT 2.997,-12.411 r180 bottom
VR1 "1K_LOG" POT_1K_LOG_TH_RA 50.241,-16.171 r0 bottom locked
VR2 "3V3 1.5A LDO REG" REG_3.3V_D2PAK 117.64,21.513 r180 bottom
XTAL1 "50-ECS-.327-12.5-34B-TRCT-ND" XTAL-32.768kHz -2.119,52.939 r90 bottom
XTAL2 "12.288MHz" XTAL_12.288MHz_SMD 142.824,64.986 r90 bottom

## Footprints (in the part's own frame and the unit in brackets; to place one, negate y for a bottom-side part, rotate by r counter-clockwise, add the part's x,y. Pads: shape width x height; smd on the part's side, far side on the other; paste and mask are expansions set on the pad)
1725656 [mm] "2 Position Wire to Board Terminal Block Horizontal with Board 0.100\" (2.54mm) Through Hole"
  round 1 hole 1.1 unplated: 0(-1.27,-2.54) 0(1.27,-2.54)
  rect 1.8x1.8 hole 1.1: 1(-1.27,0)
  round 1.8 hole 1.1: 2(1.27,0)
  silkscreen extent -3.05,-3.35 3.05,3.35, body extent -2.77,-3.1 2.77,3.1, height 8.5
1725672 [mm] "4 Position Wire to Board Terminal Block Horizontal with Board 0.100\" (2.54mm) Through Hole"
  rect 1.8x1.8 hole 1.1: 1(-3.81,0)
  round 1.8 hole 1.1: 2(-1.27,0) 3(1.27,0) 4(3.81,0)
  silkscreen extent -5.55,-3.35 5.55,3.35, body extent -5.31,-3.1 5.31,3.1, height 8.5
687310124422 [mm]
  rect 0.4x1.5 smd: 1(-2.25,-1.4) 2(-1.75,1.4) 3(-1.25,-1.4) 4(-0.75,1.4) 5(-0.25,-1.4) 6(0.25,1.4) 7(0.75,-1.4) 8(1.25,1.4) 9(1.75,-1.4) 10(2.25,1.4)
  rect 0.8x1.5 smd: MP1(-3.25,-1.4) MP2(-3.25,1.4) MP3(3.25,-1.4) MP4(3.25,1.4)
  silkscreen extent -5.7,-2.28 5.7,0.87, body extent -5.7,-2.11 5.7,2.11, height 4.55
"CAP ALUM 330UF 20% 50V SMD" [mm]
  rect 5.1x2 smd: 1(-3.825,0) 2(3.825,0)
  silkscreen extent -6,-5.5 6,5.5, body extent -5.5,-5.15 5.5,5.15, height 10.51
CAP-1206 [mm]
  rect 1.25x1.8 smd: 1(-1.5,0) 2(1.5,0)
  silkscreen extent -0.7,-1 0.7,1, body extent -1.6,-0.78 1.6,0.78, height 1.68
Cap_0603_M [mm] "Yageo KEMET Maximum Density (Level A) Footprint using Nominal Land Protusion (Level B), reference at part centre. Datasheet: https://www.yageogroup.com/content/datasheet/asset/file/KEM_C1006_X5R_SMD"
  rect 0.95x1 smd: 1(-0.8,0) 2(0.8,0)
  silkscreen extent -0.2,-0.6 0.2,0.6, body extent -0.8,-0.4 0.8,0.4, height 0.91
CAP_1210_N [mm] "Yageo KEMET Nominal Density Footprint using Nominal Land Protusion (Level B), reference at part centre. Datasheet: https://www.yageogroup.com/content/datasheet/asset/file/KEM_C1006_X5R_SMD"
  rect 1.15x2.7 smd: 1(-1.5,0) 2(1.5,0)
  silkscreen extent -2.35,-1.6 2.35,1.6, body extent -1.8,-1.4 1.8,1.4, height 1.46
CAPMP3.4X1.6_1.8N_KEM-M [mm]
  rect 1.7x1.4 smd: 1(-1.2,0) 2(1.2,0)
  silkscreen extent -2.3,-0.9 0.3,0.9, body extent -1.7,-0.9 1.7,0.9, height 1.82
CONN_3.5MM_COMBO [mm]
  oval 4x1.6 hole 1.6 slot 4 at 0 deg unplated: 0(-1,-2.2) 0(-1,2.2)
  round 1.8 hole 1.2: 0(5,0)
  round 1.3 hole 1.2: 0(10,-5) 0(10,5)
  rect 1.5x1.5 hole 0.8 slot 1.5 at 90 deg: 1(0,0)
  oval 4x1.8 hole 1.5 slot 3.7 at 0 deg: 1A(-1.25,-5) 1B(-1.25,5)
  round 2 hole 1.5: 2A(6.5,-6.25) 5A(6.5,6.25)
  oval 2.6x1.8 hole 1.5 slot 2.5 at 0 deg copper offset -0.1,0: 2B_3(4.5,5) 5B_2(4.5,-5)
  round 1.3 hole 1: 4(10,2.5) 5(10,0) 6(10,-2.5) 10(5,-2.5) 11(5,2.5)
  silkscreen extent -4.2,-7.5 11.4,7.7, body extent -7.5,-7 12,7, height 26.01
CONN_3.5MM_STEREO_DBL_VERT_TH [mm]
  rect 4.5x2.2 hole 2 slot 4 at 0 deg unplated: 0(3.5,-2) 0(3.5,2)
  round 2 hole 1.5: 1A(3.5,-5) 1B(3.5,5) 2A(11,-6.25) 2B(8.5,5) 5A(11,6.25) 5B(8.5,-5)
  silkscreen extent 0.3,-7.7 12.5,7.7, body extent -3,-7 12.5,7, height 26.01
CONN_10x_3220-10-0300-00 [mm] "Maximum Density Courtyard, Datasheet:https://www.cnctech.us/pdfs/3220-XX-0300-00_.pdf"
  rect 0.65x2.77 smd: 1(-2.54,-1.85) 2(-2.54,1.85) 3(-1.27,-1.85) 4(-1.27,1.85) 5(0,-1.85) 6(0,1.85) 7(1.27,-1.85) 8(1.27,1.85) 9(2.54,-1.85) 10(2.54,1.85)
  silkscreen extent -7.2,-4.3 6.5,3.5, body extent -6.35,-2.75 6.35,2.75, height 5.15
CONN_DC_JACK_2.1mmID_5.5mmOD_RA_TH [mm]
  rrect50% 2.8x1.524 hole 1 slot 2.4 at 0 deg: 0(-1,-3.7) 0(-1,6.2)
  round 3 hole 2.4: 0(0,0)
  rrect50% 2.8x1.524 hole 1 slot 2.2 at 0 deg: 1(6.3,-3.3) 2(6.3,5.3) 3(6.3,0.1)
  silkscreen extent -3.89,-4.43 8.03,6.6, body extent -3.98,-3.8 7.77,6.3, height 7.3
CONN_JACK_STEREO_3.5MM_SPDT_RA [mm]
  round 1.3 hole 1.2: 0(-6.25,-5) 0(-6.25,5) 0(-3.75,-5) 0(-3.75,5) 0(6.25,-5) 0(6.25,5)
  round 1.8 hole 1.2: 0(1.25,0)
  rect 1.1x1.8 hole 0.8 slot 1.5 at 90 deg: 1(-3.75,0)
  rect 1.8x1.1 hole 0.8 slot 1.5 at 0 deg: 2(1.25,-5) 3(1.25,5) 10(1.25,-2.5) 11(1.25,2.5)
  round 1.3 hole 1: 4(6.25,2.5) 5(6.25,0) 6(6.25,-2.5)
  silkscreen extent -7.28,-6.22 8.5,6.22, body extent -10.28,-6 8.22,6, height 5.51
CONN_SD_CARD_SMD [mm]
  rect 0.8x1.5 smd: 1(-1.94,3.1) 2(-0.84,2.7) 3(0.26,3.1) 4(1.36,3.3) 5(2.46,3.1) 6(3.56,3.3) 7(4.66,3.1) 8(5.76,3.1)
  rect 1.4x1.9 smd: 9(6.55,5.95) 10(-6.6,6.95)
  rect 1.8x1.4 smd: CD1(4.95,-7.2) CD2(-0.75,-7.2)
  silkscreen extent -7,-7.6 7,7.6, body extent -7,-7.6 7,7.6, height 1.86
CONN_TP_SMD [mm]
  round 2 smd: 1(0,0)
  silkscreen extent -1.3,-1.3 1.3,1.3
ENC_ROTARY_20PPR_TH [mm]
  rrect50% 1.7x3.4 hole 1.4 slot 3 at 90 deg: 0(-5.7,0) 0(5.7,0)
  round 1.6 hole 1.2: 1(-2.5,7) 2(2.5,7) 3(-2.5,-7.5) 4(0,-7.5) 5(2.5,-7.5)
  silkscreen extent -7.25,-8.55 7.25,8.05, body extent -7.05,-7.67 6.94,7.22, height 29.49
FB_0805 [mm] "Designed for MI0805M221R-10, Maximum density courtyard. Datasheet:https://www.laird.com/sites/default/files/mi0805m221r-10-datasheet.pdf"
  rect 1.29x1.47 smd: 1(-0.98,0) 2(0.98,0)
  silkscreen extent -0.2,-0.9 0.2,0.9, body extent -1.1,-0.72 1.1,0.72, height 1.09
FER_8A_4mOHM_0603 [mm]
  rect 0.9x1 smd: 1(-0.85,0) 2(0.85,0)
  silkscreen extent -0.25,-0.6 0.25,0.6, body extent -0.8,-0.38 0.8,0.37, height 0.81
HDRV5W67P0X254_1X5_1270X241X858P [mm]
  rect 1.8x1.8 hole 1.15: 1(0,0)
  round 1.8 hole 1.15: 2(2.54,0) 3(5.08,0) 4(7.62,0) 5(10.16,0)
  silkscreen extent -1.52,-1.5 11.68,1.5, body extent -1.27,-1.2 11.43,1.2, height 8.58
IC_BUF_ESD_CD74HC4050MT [mm]
  rrect25% 1.97x0.6 smd: 1(-2.475,4.445) 2(-2.475,3.175) 3(-2.475,1.905) 4(-2.475,0.635) 5(-2.475,-0.635) 6(-2.475,-1.905) 7(-2.475,-3.175) 8(-2.475,-4.445) 9(2.475,-4.445) 10(2.475,-3.175) 11(2.475,-1.905) 12(2.475,-0.635) 13(2.475,0.635) 14(2.475,1.905) 15(2.475,3.175) 16(2.475,4.445)
  silkscreen extent -4.1,-5.06 1.95,5.4, body extent -3,-4.95 3,4.95, height 1.75
IC_DEBOUNCE_8IN8OUT_SMD [mm]
  rrect25% 1.7x0.42 smd: 1(-3.46,2.925) 2(-3.46,2.275) 3(-3.46,1.625) 4(-3.46,0.975) 5(-3.46,0.325) 6(-3.46,-0.325) 7(-3.46,-0.975) 8(-3.46,-1.625) 9(-3.46,-2.275) 10(-3.46,-2.925) 11(3.46,-2.925) 12(3.46,-2.275) 13(3.46,-1.625) 14(3.46,-0.975) 15(3.46,-0.325) 16(3.46,0.325) 17(3.46,0.975) 18(3.46,1.625) 19(3.46,2.275) 20(3.46,2.925)
  silkscreen extent -4.7,-3.7 2.7,4, body extent -3.89,-3.6 3.89,3.6, height 2
IC_MDBT50Q-1M_SMD [mm] "RAYTAC nRF52840 Chip Antenna"
  round 3.264 hole 3.264 unplated: 0(5.25,-12.44)
  rect 0.6x0.4 smd mask+0.05: 1(0.6,11.5) 2(0.6,10.4) 3(0.6,9.6) 4(0.6,8) 5(1.5,7.6) 6(0.6,7.2) 7(1.5,6.8) 8(0.6,6.4) 9(1.5,6) 10(0.6,5.6) 11(1.5,5.2) 12(0.6,4.8) 13(1.5,4.4) 14(0.6,4) 34(9.9,1.6) 35(9.9,2.4) 36(9,2.8) 37(9.9,3.2) 38(9,3.6) 39(9.9,4) 40(9,4.4) 41(9.9,4.8) 42(9,5.2) 43(9,6) 44(9.9,6.4) 45(9,6.8) 46(9.9,7.2) 47(9,7.6) 48(9.9,8) 49(9,8.4) 50(9,9.2) 51(9.9,9.6) 52(9,10) 53(9.9,10.4) 54(9,10.8) 55(9.9,11.5)
  rect 0.4x0.6 smd mask+0.05: 15(0.45,0.6) 16(1.25,0.6) 17(2.05,0.6) 18(2.85,0.6) 19(3.25,1.5) 20(3.65,0.6) 21(4.05,1.5) 22(4.45,0.6) 23(4.85,1.5) 24(5.25,0.6) 25(5.65,1.5) 26(6.05,0.6) 27(6.45,1.5) 28(6.85,0.6) 29(7.25,1.5) 30(7.65,0.6) 31(8.45,0.6) 32(9.25,0.6) 33(10.05,0.6) 56(3.25,7.2) 57(4.05,7.2) 58(4.85,7.2) 59(5.65,7.2) 60(6.45,7.2) 61(7.25,7.2)
  Top Layer keep-out region: 2.15,11.7 3.75,11.7 3.75,10.5 2.15,10.5
  Top Layer keep-out region: -6.2,17.1 16.7,17.1 16.7,11.7 -6.2,11.7
  Bottom Layer keep-out region: -6.2,17.1 16.7,17.1 16.7,11.7 -6.2,11.7
  silkscreen extent -0.25,-0.25 10.75,15.75, body extent 0,0 10.5,15.5, height 2.2
IC_REG_LINEAR_3V3_1V8_SMD [mm] "IC REG LINEAR 1.8V/3.3V SOT26"
  rect 0.6x1.1 smd: 1(-0.95,-1.3) 2(0,-1.3) 3(0.95,-1.3) 4(0.95,1.3) 5(0,1.3) 6(-0.95,1.3)
  silkscreen extent -1.75,-2.11 1.75,2.1, body extent -1.45,-1.2 1.45,1.2, height 1.11
IC_SSR_NO_SMD [mm] "Solid State SPST-NO (1 Form A) 6-SMD, Gull Wing"
  rect 0.9x1.3 smd: 1(-1.27,-3.5) 3(1.27,-3.5) 4(1.27,3.5) 6(-1.27,3.5)
  silkscreen extent -2,-4.5 1.95,2.25, body extent -1.85,-3.5 1.85,3.5, height 2.2
IC_VS1053B_LQFP48 [mm] "VS1053B MP3/WAV/OGG/MIDI PLAYER"
  rect 1.5x0.3 smd: 1(-4.45,2.75) 2(-4.45,2.25) 3(-4.45,1.75) 4(-4.45,1.25) 5(-4.45,0.75) 6(-4.45,0.25) 7(-4.45,-0.25) 8(-4.45,-0.75) 9(-4.45,-1.25) 10(-4.45,-1.75) 11(-4.45,-2.25) 12(-4.45,-2.75) 25(4.45,-2.75) 26(4.45,-2.25) 27(4.45,-1.75) 28(4.45,-1.25) 29(4.45,-0.75) 30(4.45,-0.25) 31(4.45,0.25) 32(4.45,0.75) 33(4.45,1.25) 34(4.45,1.75) 35(4.45,2.25) 36(4.45,2.75)
  rect 0.3x1.5 smd: 13(-2.75,-4.45) 14(-2.25,-4.45) 15(-1.75,-4.45) 16(-1.25,-4.45) 17(-0.75,-4.45) 18(-0.25,-4.45) 19(0.25,-4.45) 20(0.75,-4.45) 21(1.25,-4.45) 22(1.75,-4.45) 23(2.25,-4.45) 24(2.75,-4.45) 37(2.75,4.45) 38(2.25,4.45) 39(1.75,4.45) 40(1.25,4.45) 41(0.75,4.45) 42(0.25,4.45) 43(-0.25,4.45) 44(-0.75,4.45) 45(-1.25,4.45) 46(-1.75,4.45) 47(-2.25,4.45) 48(-2.75,4.45)
  silkscreen extent -3.9,-3.5 3.5,3.9, body extent -4.57,-4.57 4.57,4.57, height 1.62
LCD_Screen_16x2 [mm] "SPARKFUN 16X2 SERLCD - RGB TEXT"
  round 3.251 hole 2.489: 0(0,0) 0(0,30.48) 0(74.93,0) 0(74.93,30.48)
  round 1.5 hole 1.1: 1(65.227,30.988) 2(62.687,30.988) 3(60.147,30.988) 4(57.607,30.988) 5(45.39,30.988) 6(42.85,30.988) 7(40.31,30.988) 8(37.77,30.988) 9(35.23,30.988) 10(32.69,30.988) 11(30.15,30.988) 12(27.61,30.988) 13(25.07,30.988) 14(22.53,30.988) 15(19.99,30.988) 16(17.45,30.988) 17(14.91,30.988) 18(12.37,30.988) 19(9.83,30.988) 20(7.29,30.988)
  silkscreen extent -2.43,-2.79 77.33,33.27, body extent -2.4,-2.79 77.33,33.27, height 4.44
LED_0603_SMD [mm] "General Pads for LiteON 0603 LED"
  rect 0.8x0.8 smd: 1(-0.725,0) 2(0.775,0)
  silkscreen extent -1.4,-0.63 1.62,0.63, body extent -0.76,-0.4 0.84,0.4, height 0.56
LED_Dome_4LED [mm]
  round 1.52 hole 0.92: 1(0,-3.186) 3(0,3.186)
  oval 1.52x2.8 hole 0.92 slot 2.3 at 90 deg: 2(0,0)
  round 1.016 hole 3.2 unplated: ""(-8.314,-4.8) ""(0,9.6) ""(8.314,-4.8)
  silkscreen extent -12.38,-12.38 12.38,12.38, body extent -1.95,-3.83 1.95,3.83, height 10.5
LIPO-CHARGING_8.4V_10DFN [mm] "dual lip charging IC 8.4V 10DFN"
  rect 2.48x1.55 smd: 0(0,0)
  rect 0.3x0.65 smd mask+0.05: 1(-1,-1.55) 2(-0.5,-1.55) 3(0,-1.55) 4(0.5,-1.55) 5(1,-1.55) 6(1,1.55) 7(0.5,1.55) 8(0,1.55) 9(-0.5,1.55) 10(-1,1.55)
  silkscreen extent -1.75,-2.25 1.75,2.25, body extent -1.55,-1.56 1.55,1.56, height 0.81
MAX9744_T4477 [mm] "Maxim IC_ 44-Thin QFN 7x7x0.75mm, Exposed Pad 4.78x4.78mm"
  rect 4.78x4.78 smd: 0(0,0)
  rect 0.95x0.3 smd: 1(-3.325,2.5) 2(-3.325,2) 3(-3.325,1.5) 4(-3.325,1) 5(-3.325,0.5) 6(-3.325,0) 7(-3.325,-0.5) 8(-3.325,-1) 9(-3.325,-1.5) 10(-3.325,-2) 11(-3.325,-2.5) 23(3.325,-2.5) 24(3.325,-2) 25(3.325,-1.5) 26(3.325,-1) 27(3.325,-0.5) 28(3.325,0) 29(3.325,0.5) 30(3.325,1) 31(3.325,1.5) 32(3.325,2) 33(3.325,2.5)
  rect 0.3x0.95 smd: 12(-2.5,-3.325) 13(-2,-3.325) 14(-1.5,-3.325) 15(-1,-3.325) 16(-0.5,-3.325) 17(0,-3.325) 18(0.5,-3.325) 19(1,-3.325) 20(1.5,-3.325) 21(2,-3.325) 22(2.5,-3.325) 34(2.5,3.325) 35(2,3.325) 36(1.5,3.325) 37(1,3.325) 38(0.5,3.325) 39(0,3.325) 40(-0.5,3.325) 41(-1,3.325) 42(-1.5,3.325) 43(-2,3.325) 44(-2.5,3.325)
  silkscreen extent -4.23,-3.6 3.6,4.25, body extent -3.56,-3.56 3.56,3.56, height 0.83
"MIC_ELECTRET_CASTLE PAD" [mm]
  round 1.525 hole 1.5: 1(1.4,1.778) 2(-1.4,1.778)
  Top Layer region: -3.4,1.028 -3.725,1.102 -3.986,1.31 -4.131,1.611 -4.131,1.945 -3.986,2.246 -3.725,2.454 -3.4,2.528 -3.4,2.528 -1.4,2.528 -1.4,1.028
  Top Layer region: 1.4,1.028 3.388,1.028 3.718,1.099 3.983,1.306 4.131,1.609 4.131,1.947 3.983,2.25 3.718,2.457 3.388,2.528 3.388,2.528 1.4,2.528
  Bottom Layer region: -3.4,1.028 -3.725,1.102 -3.986,1.31 -4.131,1.611 -4.131,1.945 -3.986,2.246 -3.725,2.454 -3.4,2.528 -3.4,2.528 -1.4,2.528 -1.4,1.028
  Bottom Layer region: 1.4,1.028 3.388,1.028 3.718,1.099 3.983,1.306 4.131,1.609 4.131,1.947 3.983,2.25 3.718,2.457 3.388,2.528 3.388,2.528 1.4,2.528
  silkscreen extent -5.1,-5.1 5.1,5.1, body extent -4.85,-4.85 4.85,4.85, height 5.01
MOSFET_P-CH_20V_SOT23 [mm] "p-channel MOSFET 20V 3.6A SOT23"
  rect 0.8x0.9 smd: 1(-0.95,-1) 2(0.95,-1) 3(0,1)
  silkscreen extent -1.75,-1.9 1.75,1.8, body extent -1.5,-1.25 1.5,1.25, height 1.01
onSemi_SOT-23_N [mm] "Slightlly modified version of standard onSemi SOT−23 (TO−236) 2.90x1.30x1.00 1.90P footprint, pads slighly enlarged, medium courtyard / Reference: https://www.onsemi.com/pdf/datasheet/bc846alt1-d.pdf"
  rect 1.05x0.6 smd: 1(-0.975,0.95) 2(-0.975,-0.95) 3(0.975,0)
  silkscreen extent -1.85,-1.45 0.65,1.8, body extent -1.2,-1.45 1.2,1.45, height 1.11
POT_1K_LOG_TH_RA [mm]
  round 1.8 hole 1.2: 1(-2.54,0) 2(0,0) 3(2.54,0) 4(-2.54,2.54) 5(0,2.54) 6(2.54,2.54)
  silkscreen extent -4.83,-2.16 4.83,6.1, body extent -4.8,-2.1 4.8,22.55, height 11.33
REG_3.3V_D2PAK [mm]
  rect 1.016x3.504 smd: 1(-2.54,-10.213) 3(2.54,-10.213)
  rect 10.49x8.38 smd: TAB(0,0)
  silkscreen extent -5.75,-12.61 5.75,4.75, body extent -5.01,-10.85 5.01,3.35, height 4.58
Res_0603_M [mm] "Designed to work with TE and Yageo Parts, using Yageo dimensions, Maximum Density courtyard, silk at courtyard. /  / Datasheet: https://www.yageogroup.com/content/Resource%20Library/Product%20Guide-Catalog/yageo_PYu-R_Mount_10_19050818_343.pdf"
  rect 0.9x1 smd: 1(-0.85,0) 2(0.85,0)
  silkscreen extent -0.25,-0.64 0.25,0.64, body extent -0.8,-0.41 0.8,0.41, height 0.71
SCHOTTKY_20V_3A_SMB [mm]
  rect 2.5x2.3 smd: 1(-2.15,0) 2(2.15,0)
  silkscreen extent -3.9,-2 4.6,2, body extent -2.7,-1.8 2.7,1.8, height 2.32
SOT-SC70 [mm] "SOT-SC70 (TI_DCK0003A) 3 leads-2.0x1.4x1.1mm, Maximum Density Courtyard. Datasheet: https://www.ti.com/lit/ml/mpds295g/mpds295g.pdf?ts=1765950302425&ref_url=https%253A%252F%252Fwww.google.com%252F"
  rect 0.4x0.95 smd mask+0.07: 1(-0.65,-1.1) 2(0.65,-1.1) 3(0,1.1)
  silkscreen extent -1,-0.7 1,0.7, body extent -1,-1.05 1,1.05, height 1
SW_SLIDE_RA_TH_DPDT [mm] "SW_SLIDE_RA_TH_DPDT"
  rect 1.5x1.5 hole 0.8: 1(1,-2)
  round 1.5 hole 0.8: 2(1,0) 3(1,2) 4(-1,2) 5(-1,0) 6(-1,-2)
  round 2.2 hole 1.5: 7(0,4.8) 8(0,-4.8)
  silkscreen extent -3,-5 2.67,5, body extent -3,-5 6.95,5, height 3.71
SW_SLIDE_SPDT_VERT_TH [mm]
  round 1.2 hole 0.8: 1(-2.5,1.6) 2(0,1.6) 3(2.5,1.6) 4(-2.5,-1.6) 5(0,-1.6) 6(2.5,-1.6)
  silkscreen extent -4.35,-2.5 4.38,2.48, body extent -4.25,-1.77 4.25,1.73, height 7.91
SW_TACTILE_SPST-NO [mm] "SWITCH TACTILE SPST-NO 0.02A 15V"
  rect 3.2x1.55 smd: 1(-3.4,-2.025) 1(3.4,-2.025) 2(-3.4,1.975) 2(3.4,1.975)
  silkscreen extent -3.5,-3.2 3.5,3.2, body extent -3.3,-3 3.3,3, height 3.1
TAG_CONNECT_TC2030 [mil] "TC2030-IDC Datasheet: https://mm.digikey.com/Volume0/opasdata/d220001/medias/docus/2084/TC2030-IDC_RevB.pdf"
  round 31 smd paste-99999 mask+4: 1(-50,-25) 2(-50,25) 2(-50,25) 3(0,-25) 3(0,-25) 4(0,25) 4(0,25) 5(50,-25) 5(50,-25) 6(50,25) 6(50,25)
  round 39 hole 39 unplated: ""(-100,0) ""(100,-40) ""(100,40)
  Keep-Out Layer region: -50,25 50,25 50,-25 -50,-25
  silkscreen extent -177,-130 177,130
"TEST POINT ROUND SMD 0.6mm" [mm]
  round 0.6 smd mask+0: 1(0,0)
XTAL-32.768kHz [mm]
  rect 1.1x1.9 smd: 1(-1.25,0) 2(1.25,0)
  silkscreen extent -0.5,-1.05 0.5,1.05, body extent -1.6,-0.75 1.6,0.75, height 0.91
XTAL_12.288MHz_SMD [mm] "12.288 MHz ±30ppm Crystal 10pF 80 Ohms 4-SMD, No Lead"
  rect 1.4x1.2 smd: 1(-1.105,-0.85) 2(1.1,-0.85) 3(1.1,0.85) 4(-1.1,0.85)
  silkscreen extent -2.6,-2.2 2.05,1.7, body extent -1.6,-1.24 1.6,1.24, height 0.99

## Part data
C1 C2 C3 C4: library part CAP_470pF_0603, "470 pF ±10% 50V Ceramic Capacitor X7R 0603 (1608 Metric)", Supplier Part Number 1=311-1078-1-ND, Supplier 1=Digi-Key
C5 C6 C7 C8 C10 C18 C23 C26 C34 C40 C43 C44 C45 C46 C47 C50 C55 C56: library part CAP_0.1uF_0603, "0603 100 nF 25 V -20 / +80 % Tolerance Y5V SMT Multilayer Ceramic Capacitor", Capacitance=100nF, Case Code=0603, Case Code (Metric)=1608, Dielectric=Y5V, Insulation Resistance=100GR, Manufacturer="Kyocera AVX", Manufacturer Part Number=KGM15AV51E104ZT, Max Operating Temperature=85°C, Min Operating Temperature=-30°C, Package Quantity=1, Supplier Part Number 1=478-KGM15AV51E104ZTCT-ND, Tolerance=80%, Voltage=25V, Case Code (Imperial)=0603, Case/Package=0603, Category="Ceramic Capacitors", ComponentLink1Description=https://datasheet.ciiva.com/11786/0900766b802d4699-11786267.pdf?src-supplier=RSComponents, ComponentLink1URL=https://datasheet.ciiva.com/11786/0900766b802d4699-11786267.pdf?src-supplier=RSComponents, ComponentLink2Description=https://datasheet.ciiva.com/1124/318409-1124608.pdf?src-supplier=Element14, ComponentLink2URL=https://datasheet.ciiva.com/1124/318409-1124608.pdf?src-supplier=Element14, ComponentLink3Description=https://datasheet.ciiva.com/203/cy5v-203689.pdf?src-supplier=Digi-Key, ComponentLink3URL=https://datasheet.ciiva.com/203/cy5v-203689.pdf?src-supplier=Digi-Key, ComponentLink4Description=https://datasheet.ciiva.com/203/cy5v-203690.pdf?src-supplier=Digi-Key, ComponentLink4URL=https://datasheet.ciiva.com/203/cy5v-203690.pdf?src-supplier=Digi-Key, ComponentLink5Description=https://datasheet.ciiva.com/203/cy5v-203691.pdf?src-supplier=Digi-Key, ComponentLink5URL=https://datasheet.ciiva.com/203/cy5v-203691.pdf?src-supplier=Digi-Key, ComponentLink6Description=https://datasheet.ciiva.com/11464/cy5v-11464567.pdf?src-supplier=Avnet, ComponentLink6URL=https://datasheet.ciiva.com/11464/cy5v-11464567.pdf?src-supplier=Avnet, ComponentLink7Description=https://datasheet.ciiva.com/2987/cy5v-2987766.pdf?src-supplier=Avnet, ComponentLink7URL=https://datasheet.ciiva.com/2987/cy5v-2987766.pdf?src-supplier=Avnet, ComponentLink8Description=https://datasheet.ciiva.com/1124/578190-1124654.pdf?src-supplier=Element14, ComponentLink8URL=https://datasheet.ciiva.com/1124/578190-1124654.pdf?src-supplier=Element14, ComponentLink9Description=https://datasheet.ciiva.com/1124/578190-1124655.pdf?src-supplier=Element14, ComponentLink9URL=https://datasheet.ciiva.com/1124/578190-1124655.pdf?src-supplier=Element14, ComponentLink10Description=https://datasheet.ciiva.com/14590/70001073-14590664.pdf?src-supplier=Allied+Electronics, ComponentLink10URL=https://datasheet.ciiva.com/14590/70001073-14590664.pdf?src-supplier=Allied+Electronics, ComponentLink11Description=https://datasheet.ciiva.com/28613/578190-28613276.pdf?src-supplier=Element14, ComponentLink11URL=https://datasheet.ciiva.com/28613/578190-28613276.pdf?src-supplier=Element14, ComponentLink12Description=https://datasheet.ciiva.com/16484/cy5v-16484423.pdf?src-supplier=Avnet+Asia, ComponentLink12URL=https://datasheet.ciiva.com/16484/cy5v-16484423.pdf?src-supplier=Avnet+Asia, Construction=Flat, Contact Plating=Tin,Matte, Depth=0.81mm, Dissipation Factor=7%, Height=0.9mm, Lead Free="Lead Free", Length=1.6mm, Mount="Surface Mount,PCB", Number of Pins=2, Packaging="Tape and Reel", Radiation Hardening=No, REACH SVHC="No SVHC", RoHS=Yes, RoHS Compliant=Yes, Series=-, Supplier 1=DigiKey, Termination=SMD/SMT, Thickness=0.035inch, Voltage Rating=25V, Voltage Rating (DC)=25V, Width=0.032inch
C9 C12 C15 C21 C25 C35 C38 C39 C53 C54 C63 C67 C68 C69: library part CAP_10uF_0603, "Yageo - CC0603MRX5R7BB106 - CAP, MLCC, X5R, 10uF, 16V, 0603", Case Code (Imperial)=0603, Case Code (Metric)=1608, Dielectric=X5R, Dielectric Material=Ceramic, Manufacturer=Yageo, Manufacturer Part Number=CC0603MRX5R7BB106, Max Operating Temperature=85°C, Min Operating Temperature=-55°C, Supplier Part Number 1=311-1822-1-ND, Tolerance=20%, Voltage Rating=16V, Capacitance=10uF, Case/Package=0603, Category="Ceramic Capacitors", Construction=Flat, Depth=0.8mm, Height=0.8mm, Length=1.6mm, Mount="PCB,Surface Mount", Number of Pins=2, Packaging="Tape and Reel", Pricing 1="1=0.32000, 10=0.22000, 50=0.14680, 100=0.12470, 500=0.08804, 1000=0.07704 (USD)", Radiation Hardening=No, REACH SVHC="No SVHC", RoHS=Yes, RoHS Compliant=Yes, Stock 1=109429, Supplier 1=DigiKey, Supplier 2=Mouser, Supplier Part Number 2=603-CC603MRX5R7BB106, Termination=SMD/SMT, Voltage Rating (DC)=16V
C11: library part CAP_1nF_0603, "CAP CER 0603 1NF 16V X7R 10%", Supplier Part Number 1=399-17878-1-ND, Supplier 1=Digi-Key
C13 C14 C20 C24 C27 C29 C30 C31 C57: library part CAP_1uF_0603, "0603 1 uF 50 V ±10% Tolerance X5R Surface Mount Multilayer Ceramic Capacitor", Case Code (Imperial)=0603, Case Code (Metric)=1608, Dielectric=X5R, Manufacturer="Taiyo Yuden", Manufacturer Part Number=UMK107BJ105KA-T, Max Operating Temperature=85°C, Min Operating Temperature=-55°C, Package Quantity=1, Supplier Part Number 1=587-2400-1-ND, Tolerance=10%, Voltage Rating=50V, Capacitance=1uF, Case/Package=0603, Category="Ceramic Capacitors", ComponentLink1Description=https://datasheet.ciiva.com/134/umk107bj105ka-t-ss-134740.pdf?src-supplier=Digi-Key, ComponentLink1URL=https://datasheet.ciiva.com/134/umk107bj105ka-t-ss-134740.pdf?src-supplier=Digi-Key, ComponentLink2Description=https://datasheet.ciiva.com/11601/umk107bj105ka-t-ss-11601811.pdf?src-supplier=Avnet, ComponentLink2URL=https://datasheet.ciiva.com/11601/umk107bj105ka-t-ss-11601811.pdf?src-supplier=Avnet, ComponentLink3Description=https://datasheet.ciiva.com/5744/1697715-5744913.pdf?src-supplier=Farnell, ComponentLink3URL=https://datasheet.ciiva.com/5744/1697715-5744913.pdf?src-supplier=Farnell, ComponentLink4Description=https://datasheet.ciiva.com/30199/43umk107bj105ka-t-30199791.pdf?src-supplier=Onlinecomponents.com, ComponentLink4URL=https://datasheet.ciiva.com/30199/43umk107bj105ka-t-30199791.pdf?src-supplier=Onlinecomponents.com, ComponentLink5Description=https://datasheet.ciiva.com/15922/336umk107bj105ka-t-15922611.pdf?src-supplier=Onlinecomponents.com, ComponentLink5URL=https://datasheet.ciiva.com/15922/336umk107bj105ka-t-15922611.pdf?src-supplier=Onlinecomponents.com, ComponentLink6Description=https://datasheet.ciiva.com/5427/mlcc-all-e-541559-5427036.pdf?src-supplier=Mouser, ComponentLink6URL=https://datasheet.ciiva.com/5427/mlcc-all-e-541559-5427036.pdf?src-supplier=Mouser, ComponentLink7Description=https://datasheet.ciiva.com/7975/mlcc-all-e-7975898.pdf?src-supplier=Element14, ComponentLink7URL=https://datasheet.ciiva.com/7975/mlcc-all-e-7975898.pdf?src-supplier=Element14, ComponentLink8Description=https://datasheet.ciiva.com/7975/1697715-7975608.pdf?src-supplier=Element14, ComponentLink8URL=https://datasheet.ciiva.com/7975/1697715-7975608.pdf?src-supplier=Element14, ComponentLink9Description=https://datasheet.ciiva.com/22694/1697715-22694278.pdf?src-supplier=Element14, ComponentLink9URL=https://datasheet.ciiva.com/22694/1697715-22694278.pdf?src-supplier=Element14, Construction=Flat, Contact Plating=Nickel, Depth=0.8mm, Halogen Free="Halogen Free", Height=0.8mm, Length=1.6mm, Mount="Surface Mount", Number of Pins=2, Packaging="Tape and Reel", Pricing 1="1=0.19000, 10=0.12900, 50=0.07760, 100=0.06560, 500=0.04484, 1000=0.03968 (USD)", Radiation Hardening=No, REACH SVHC=Unknown, RoHS=Yes, RoHS Compliant=Yes, Series=M, Stock 1=555277, Supplier 1=Digi-Key, Termination=SMD/SMT, Thickness=0.035inch, Voltage Rating (DC)=50V, Width=0.031inch
C16 C17: library part "CAP CER 10UF 16V X7R 1206", "10µF ±20% 16V Ceramic Capacitor X7R 1206 (3216 Metric)", Manufacturer="Samsung Electro-Mechanics", Manufacturer Part Number=CL31B106MOHNNNE, Supplier Part Number 1=1276-6641-1-ND, Temperature Range="-55°C ~ 125°C", Manufacturer Link=https://media.digikey.com/pdf/Data%20Sheets/Samsung%20PDFs/CL_Series_MLCC_ds.pdf, RoHS=3, Supplier 1=Digi-Key, Supplier 2="Future Electronics", Supplier Part Number 2=2114712
C19 C22: library part "CAP ALUM 330UF 20% 50V SMD", "330µF 50V Aluminum Electrolytic Capacitors Radial, Can - SMD 120mOhm @ 100kHz 5000 Hrs @ 105°C", Manufacturer="Panasonic Electronic Components", Manufacturer Part Number=EEE-FT1H331GP, Supplier Part Number 1=732-8514-1-ND, Temperature Range="-55°C ~ 105°C", Manufacturer Link=https://b2b-api.panasonic.eu/file_stream/pids/fileversion/3127, RoHS=3, Supplier 1=Digi-Key
C28: library part "CAP 2.2uF 0603 16V X7R 10%", "2.2µF ±10% 16V Ceramic Capacitor X7R 0603 (1608 Metric)", Manufacturer="Taiyo Yuden", Manufacturer Part Number=EMK107BB7225KA-T, Supplier Part Number 1=587-5835-1-ND, Temperature Range="-55°C ~ 125°C", Manufacturer Link=https://www.yuden.co.jp/productdata/catalog/mlcc06_e.pdf, RoHS="ROHS3 Compliant", Supplier 1=Digi-Key, Supplier 2=Mouser, Supplier Part Number 2=81-GRM188R71A225KE15
C32 C33: "T491, Tantalum, MnO2 Tantalum, Commercial Grade, 10 uF, 10%, 10 VDC, SMD, MnO2, Molded, 3.8 Ohms, 3216, Height Max = 1.8mm", Manufacturer Name=Kemet, Supplier Part Number 1=399-3684-1-ND, Copyright="Copyright (C) 2025 Ultra Librarian. All rights reserved.", Manufacturer Part Number=T491A106K010AT, Supplier 1=DigiKey, Supplier 2=Mouser, Supplier Part Number 2=80-T491A106K010
C36 C37: library part CAP_0.01uF_0603, "CAP CER SMD 0603 .01UF 5% X7R 50", Supplier Part Number 1=399-17568-1-ND, Supplier 1=Digi-Key
C41 C42: library part CAP_22pF_0603, "22 pF ±5% 250V Ceramic Capacitor C0G, NP0 0603 (1608 Metric)", Supplier Part Number 1=311-3095-1-ND, Supplier 1=Digi-Key
C48 C49: library part CAP_15pF_0603, Manufacturer="KYOCERA AVX", Manufacturer Product Number=KGM15ACG1H150JT, Supplier Part Number 1=478-KGM15ACG1H150JTCT-ND, Supplier 1=DigiKey
C51 C52: library part CAP_10nF_0603, "10000 pF ±5% 16V Ceramic Capacitor X8R 0603 (1608 Metric)", Supplier Part Number 1=399-C0603X103J4HAC7867CT-ND, Supplier 1=Digi-Key
C58 C59: library part CAP_1uF_1210, "CAP CER 1UF 50V X7R 1210", Manufacturer 1=KEMET, Manufacturer Product Number 1=C1210C105J5RACTU, Supplier Part Number 1=399-C1210C105J5RAC7800CT-ND, Supplier 1=Digi-Key
C60: library part CAP_100pF_0603, "CAP CER 100PF 50V X8R 0603", Supplier Part Number 1=399-C0603C101F5HAC7867CT-ND, Supplier 1=Digi-Key
C61 C64: library part CAP_3.3nF_0603, "0603 3.3nF SMT Multilayer Ceramic Capacitor", Case Code=0603, Case Code (Metric)=1608, Dielectric=X7R, Insulation Resistance=100GR, Manufacturer=KEMET, Manufacturer Part Number=C0603C332J5RACTU, Max Operating Temperature=125°C, Min Operating Temperature=-55°C, Package Quantity=1, Supplier Part Number 1=399-C0603C332J5RACTUCT-ND, Tolerance=5%, Voltage=50V, Capacitance=3.3nF, Case Code (Imperial)=0603, Case/Package=0603, Category="Ceramic Capacitors", Construction=Flat, Contact Plating=Tin,Matte, Depth=0.81mm, Dissipation Factor=7%, Height=0.9mm, Lead Free="Lead Free", Length=1.6mm, Mount="Surface Mount,PCB", Number of Pins=2, Packaging="Tape and Reel", Radiation Hardening=No, REACH SVHC="No SVHC", RoHS=Yes, RoHS Compliant=Yes, Series=-, Supplier 1=DigiKey, Termination=SMD/SMT, Thickness=0.035inch, Voltage Rating=50V, Voltage Rating (DC)=50V, Width=0.032inch
C62: library part CAP_0.047uF_0603, "CAP CER 0.047UF 50V X7R 0603", Manufacturer=KEMET, Manufacturer Product Number=C0603C473K5RACTU, Supplier Part Number 1=399-C0603C473K5RACTUCT-ND, Supplier 1=DigiKey
C65 C66: library part CAP_0.47uF_0603, "0.47 µF ±20% 25V Ceramic Capacitor X5R 0603 (1608 Metric)", Supplier Part Number 1=732-7917-1-ND, Supplier 1=Digi-Key
D1 D2: "TVS DIODE 13V SC70-3", Manufacturer="Texas Instruments", Supplier Part Number 1=296-25281-1-ND, Temperature Range="-40°C~85°C (TA)", Manufacturer Link=https://www.ti.com/lit/ds/symlink/tpd2e007.pdf?HQS=TI-null-null-digikeymode-df-pf-null-wwe&ts=1600795141321, Manufacturer Part Number=TPD2E007DCKR, RoHS="ROHS3 Compliant", Supplier 1=DigiKey
D3: library part SCHOTTKY_20V_3A_SMB, "Diode Schottky 20V 3A 2-Pin SMB T/R", Average Rectified Current=3A, Capacitance=250pF, Case/Package=SMB, Forward Voltage=500mV, Manufacturer=Diodes, Manufacturer Part Number=B320B-13-F, Max Forward Surge Current (Ifsm)=100A, Max Operating Temperature=150°C, Max Repetitive Reverse Voltage (Vrrm)=20V, Max Reverse Current=500uA, Min Operating Temperature=-55°C, Package Body Material=Plastic, Package Quantity=3000, Package Shape=Rectangular, Peak Reflow Temperature (Cel)=245°C, Supplier Part Number 1=B320B-FDICT-ND, Time @ Peak Reflow Temperature-Max (s)=5s, Application(s)=EFFICIENCY, Category="Schottky Diodes", ComponentLink1Description=https://datasheet.ciiva.com/26949/getdatasheetpartid-143396-26949350.pdf?src-supplier=Verical, ComponentLink1URL=https://datasheet.ciiva.com/26949/getdatasheetpartid-143396-26949350.pdf?src-supplier=Verical, ComponentLink2Description=https://datasheet.ciiva.com/19477/1589540-19477593.pdf?src-supplier=Jameco, ComponentLink2URL=https://datasheet.ciiva.com/19477/1589540-19477593.pdf?src-supplier=Jameco, ComponentLink3Description=https://datasheet.ciiva.com/26788/b320b-13-f-26788850.pdf?src-supplier=IIIC, ComponentLink3URL=https://datasheet.ciiva.com/26788/b320b-13-f-26788850.pdf?src-supplier=IIIC, ComponentLink4Description=https://datasheet.ciiva.com/914/ds30924-914408.pdf?src-supplier=Digi-Key, ComponentLink4URL=https://datasheet.ciiva.com/914/ds30924-914408.pdf?src-supplier=Digi-Key, ComponentLink5Description=https://datasheet.ciiva.com/914/ds30924-914409.pdf?src-supplier=Digi-Key, ComponentLink5URL=https://datasheet.ciiva.com/914/ds30924-914409.pdf?src-supplier=Digi-Key, ComponentLink6Description=https://datasheet.ciiva.com/914/ds30924-914410.pdf?src-supplier=Digi-Key, ComponentLink6URL=https://datasheet.ciiva.com/914/ds30924-914410.pdf?src-supplier=Digi-Key, ComponentLink7Description=https://datasheet.ciiva.com/25946/ds30924-25946725.pdf?src-supplier=Avnet+Europe, ComponentLink7URL=https://datasheet.ciiva.com/25946/ds30924-25946725.pdf?src-supplier=Avnet+Europe, Contact Plating=Tin,Matte, Current Rating=3A, Diode Element Material=SILICON, Diode Type=RECTIFIER, Element Configuration=Single, Forward Current=3A, Height=2.5mm, JESD-30 Code=R-PDSO-C2, Lead Free="Lead Free", Length=4.57mm, Max Reverse Voltage (DC)=20V, Moisture Sensitivity Level=1, Mount="Surface Mount", Number of Elements=1, Number of Phases=1, Number of Pins=2, Number of Terminals/Pins=2, Output Current=3A, Packaging="Tape and Reel", Peak Non-Repetitive Surge Current=100A, Polarity=Standard, Pricing 1="1=0.43000, 10=0.37100, 100=0.27720, 500=0.21780, 1000=0.16830 (USD)", Radiation Hardening=No, RoHS=Yes, Series=-, Stock 1=1260, Supplier 1=Digi-Key, Surface Mount=Yes, Technology=SCHOTTKY, Terminal Finish=Tin, Terminal Form="C BEND", Terminal Position=DUAL, Termination=SMD/SMT, Voltage Rating (DC)=20V, Weight=0.00328oz, Width=3.94mm
D4: library part LED_GREEN_0603, "LED GREEN CLEAR SMD", Supplier Part Number 1=160-1446-1-ND, Supplier 1=Digi-Key
D5 D6: library part LED_RED_0603, "LED RED CLEAR SMD", Supplier Part Number 1=160-1447-1-ND, Supplier 1=Digi-Key
DS1: "SPARKFUN 16X2 SERLCD - RGB TEXT", Manufacturer="SparkFun Electronics", Manufacturer Product Number=16397, Supplier Part Number 1=1568-16397-ND, Supplier 1=Digi-Key
F1 F2 F3: library part FER_8A_4mOHM_0603, "8.5 Ohms @ 100 MHz 1 Power Line Ferrite Bead 0603 (1608 Metric) 8A 4mOhm", Supplier Part Number 1=490-BLE18PS080SN1DCT-ND, Supplier 1=Digi-Key
FB1 FB2 FB3 FB4: library part "FERRITE BEAD 220 OHM 0805 1LN", "220 Ohms @ 100MHz 1 Power Line Ferrite Bead 0805 (2012 Metric) 3A 40mOhm", Manufacturer="TDK Corporation", Manufacturer Part Number=MPZ2012S221AT000, Supplier Part Number 1=240-2392-1-ND, Temperature Range="-55°C ~ 125°C", Manufacturer Link=https://product.tdk.com/info/en/catalog/datasheets/beads_commercial_power_mpz2012_en.pdf?ref_disty=digikey, RoHS=3, Supplier 1=Digi-Key
H1: "TC2030-IDC", Supplier Part Number 1=TC2030-IDC-ND, Supplier 1=Digi-Key
J1: library part CONN_DC_JACK_2.1mmID_5.5mmOD_RA_TH, "Power Barrel Connector Jack 2.10mm ID (0.083\"), 5.50mm OD (0.217\") Through Hole, Right Angle", Supplier Part Number 1=CP-051AH-ND, Supplier 1=Digi-Key, Supplier 2=Mouser, Supplier Part Number 2=490-PJ-051AH
J2 J5 J12: library part CONN_JACK_STEREO_3.5MM_SPDT_RA, "3.50mm (0.141\", 1/8\", Mini Plug) - Headphone Phone Jack Stereo (3 Conductor, TRS) Connector Solder", Supplier Part Number 1=CP-SJ-3566AN-ND, Supplier 1=DigiKey, Supplier 2=DigiKey, Supplier 3=Mouser, Supplier Part Number 2=CP-SJ-3566AN-ND, Supplier Part Number 3=490-SJ-3566AN
J3 J4: library part CONN_3.5MM_COMBO, "3.50mm (0.141\", 1/8\", Mini Plug) - Headphone Phone Jack Stereo (3 Conductor, TRS) Connector Solder", Supplier Part Number 1=2092-STX-4235-3/3-N-ND, Supplier 1=Digi-Key
J6 J7: library part CONN_3.5MM_STEREO_DBL_VERT_TH, "3.50mm (0.141\", 1/8\", Mini Plug) - Headphone Phone Jack Stereo (3 Conductor, TRS) Connector Solder", Supplier Part Number 1=2092-STX-4235-3/3-N-ND, Supplier 1=Digi-Key
J8: "8 Position Card Connector Secure Digital - microSDâ„¢ Surface Mount, Right Angle Gold", Package=None, Supplier Part Number 1=3M5607CT-ND, Digi-Key_Part_Number=3M5607CT-ND, Digi-Key_Purchase_URL=https://www.digikey.in/product-detail/en/3m/2908-05WB-MG/3M5607CT-ND/1242498?utm_source=snapeda&utm_medium=aggregator&utm_campaign=symbol, MF=3M, MP=2908-05WB-MG, SnapEDA_Link=https://www.snapeda.com/parts/2908-05WB-MG/3M%20%28TC%29/view-part/292159/?ref=snap, Supplier 1=Digi-Key
J9: "Wurth Elektronik 687 0.5mm Pitch 10 Way Straight SMT FPC Connector", Manufacturer_Name="Wurth Elektronik", Mouser Part Number=710-687310124422, Datasheet Link=https://www.we-online.com/catalog/datasheet/687310124422.pdf, Geometry.Height=4.45mm, Manufacturer_Part_Number=687310124422, Mouser Price/Stock=https://www.mouser.co.uk/ProductDetail/Wurth-Elektronik/687310124422?qs=qR1qlUC5%2FYSwH5sZ3IPHvQ%3D%3D